# Altium PCB main_mini.PcbDoc
Units mm, origin at the board's own origin, x right, y up, seen from the top; angles counter-clockwise.
Board outline 83.9 x 90.8 mm, 4 copper layers (Top Layer, Int1 (GND), Int2 (PWR), Bottom Layer), stack 1.369 mm thick; 97 components, 91 nets, 442 pads, 94 vias.
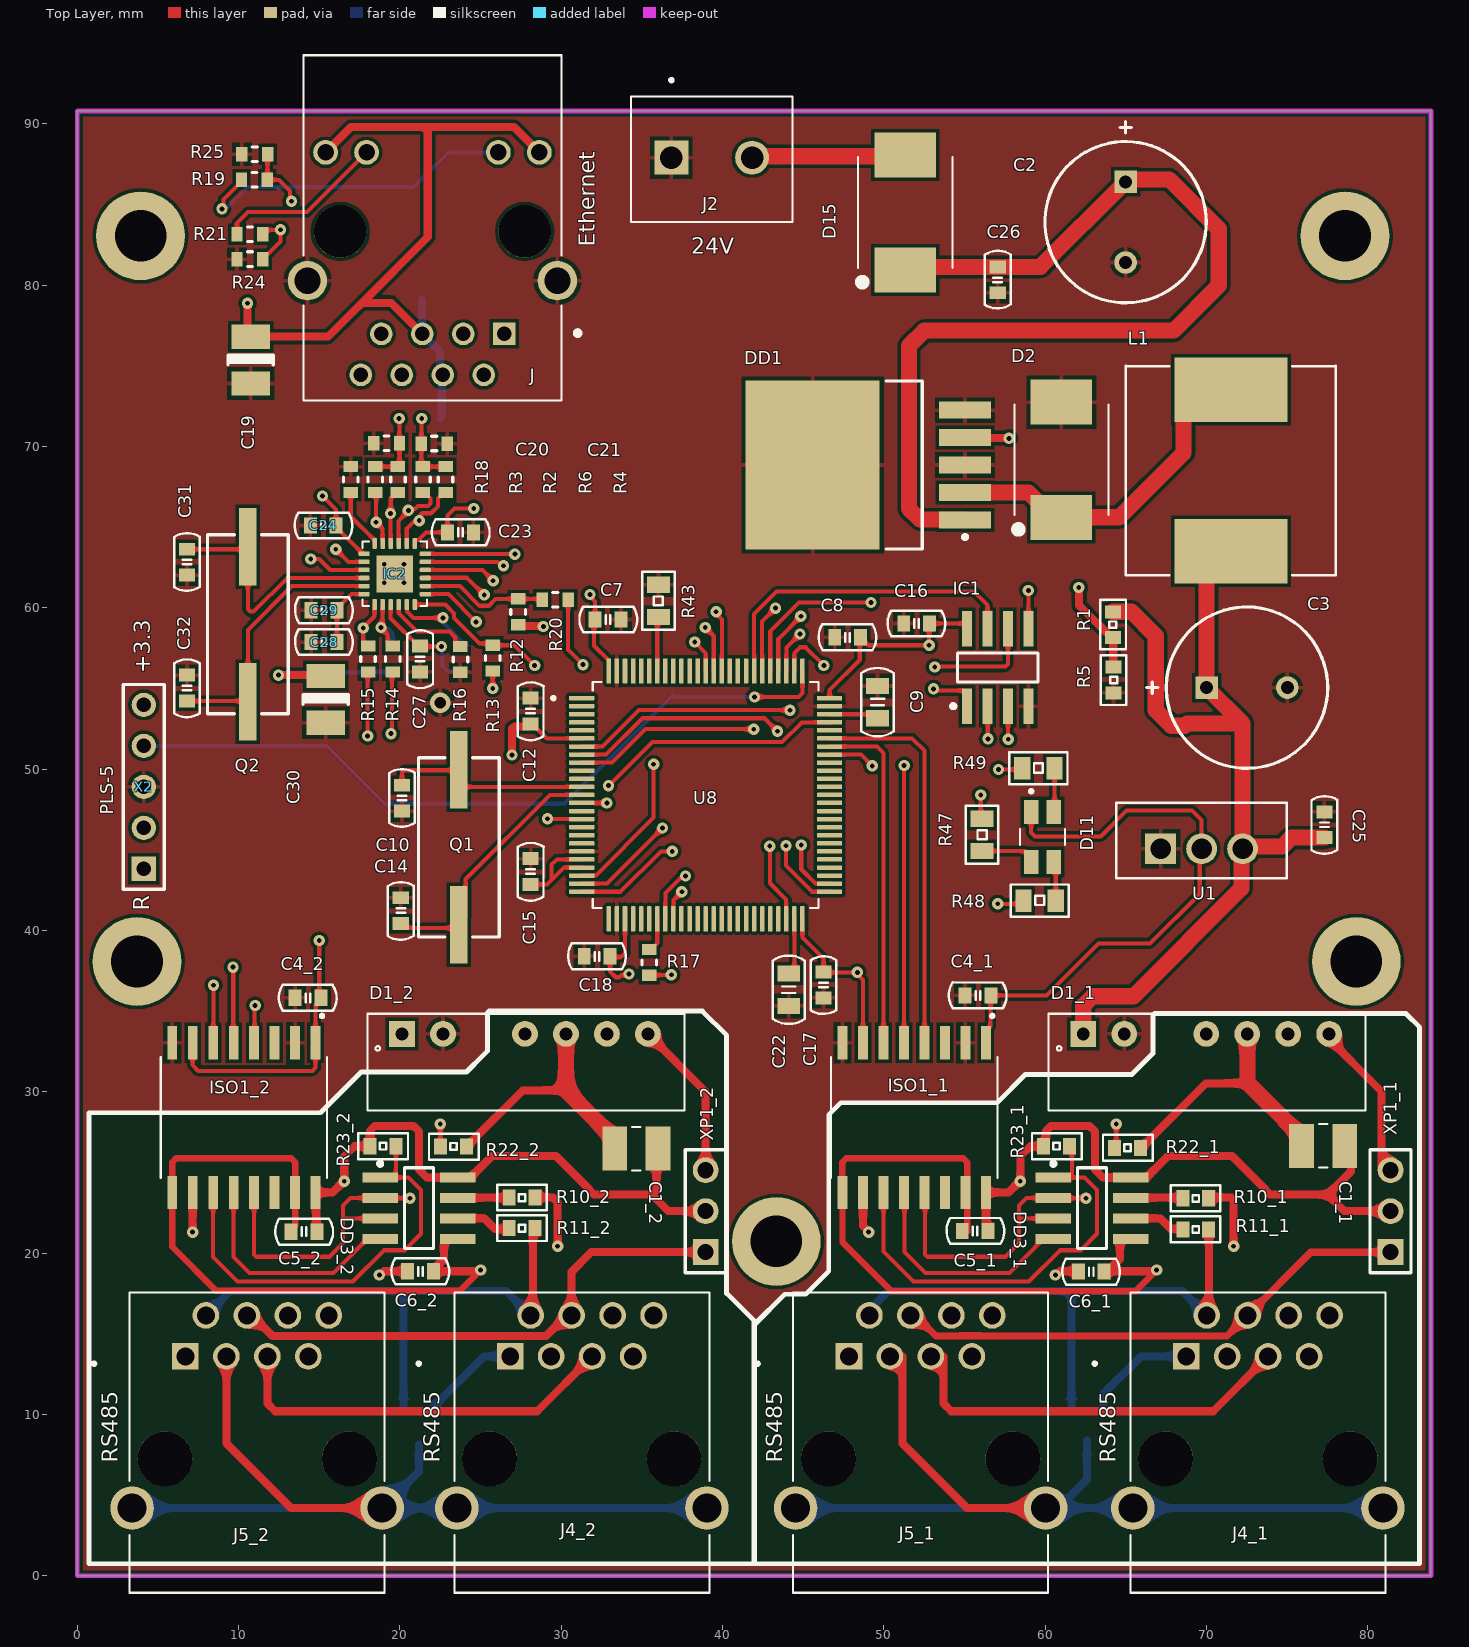
[diagram p0: Top Layer view]
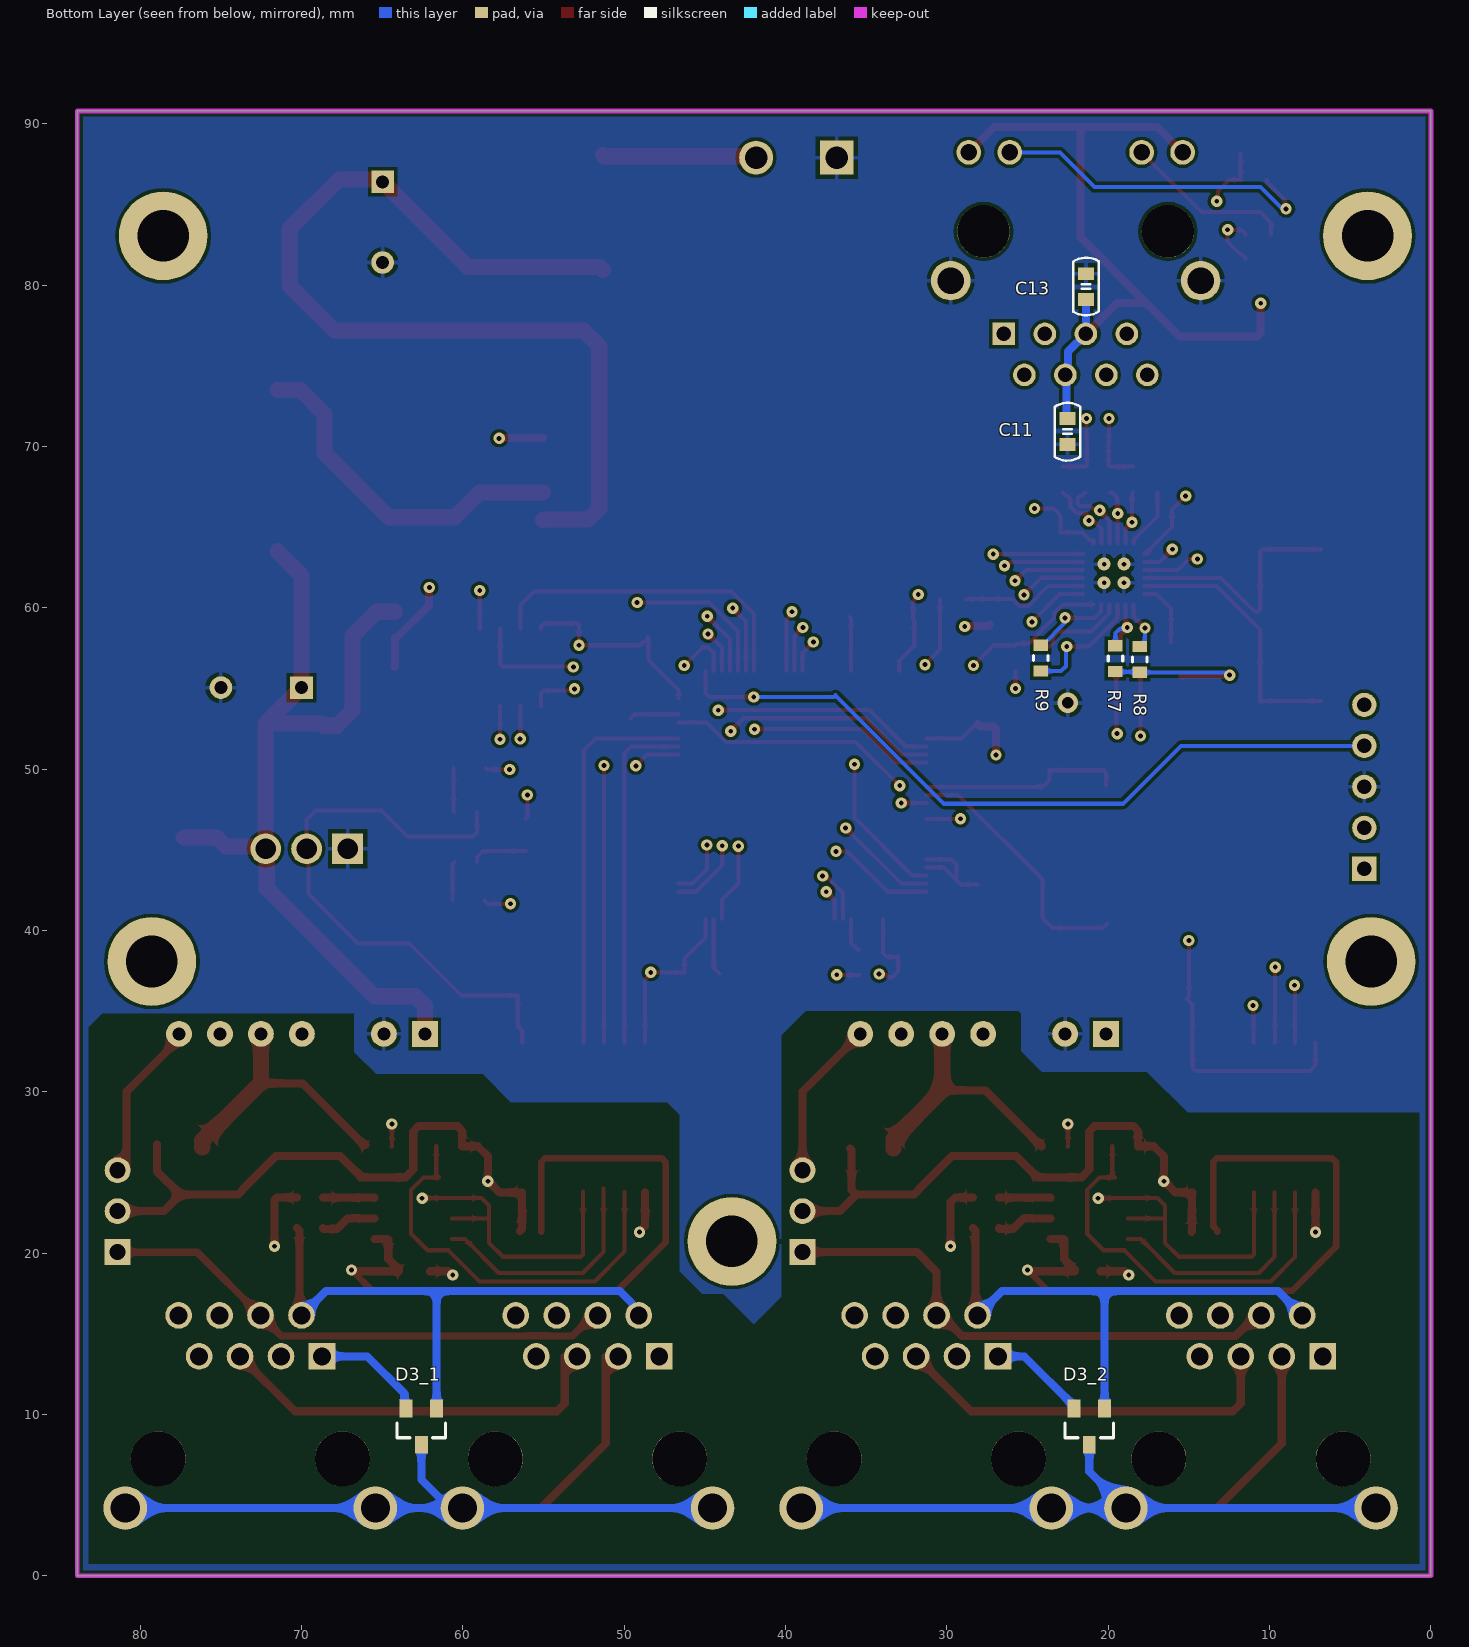
[diagram p1: Bottom Layer view, seen from below]
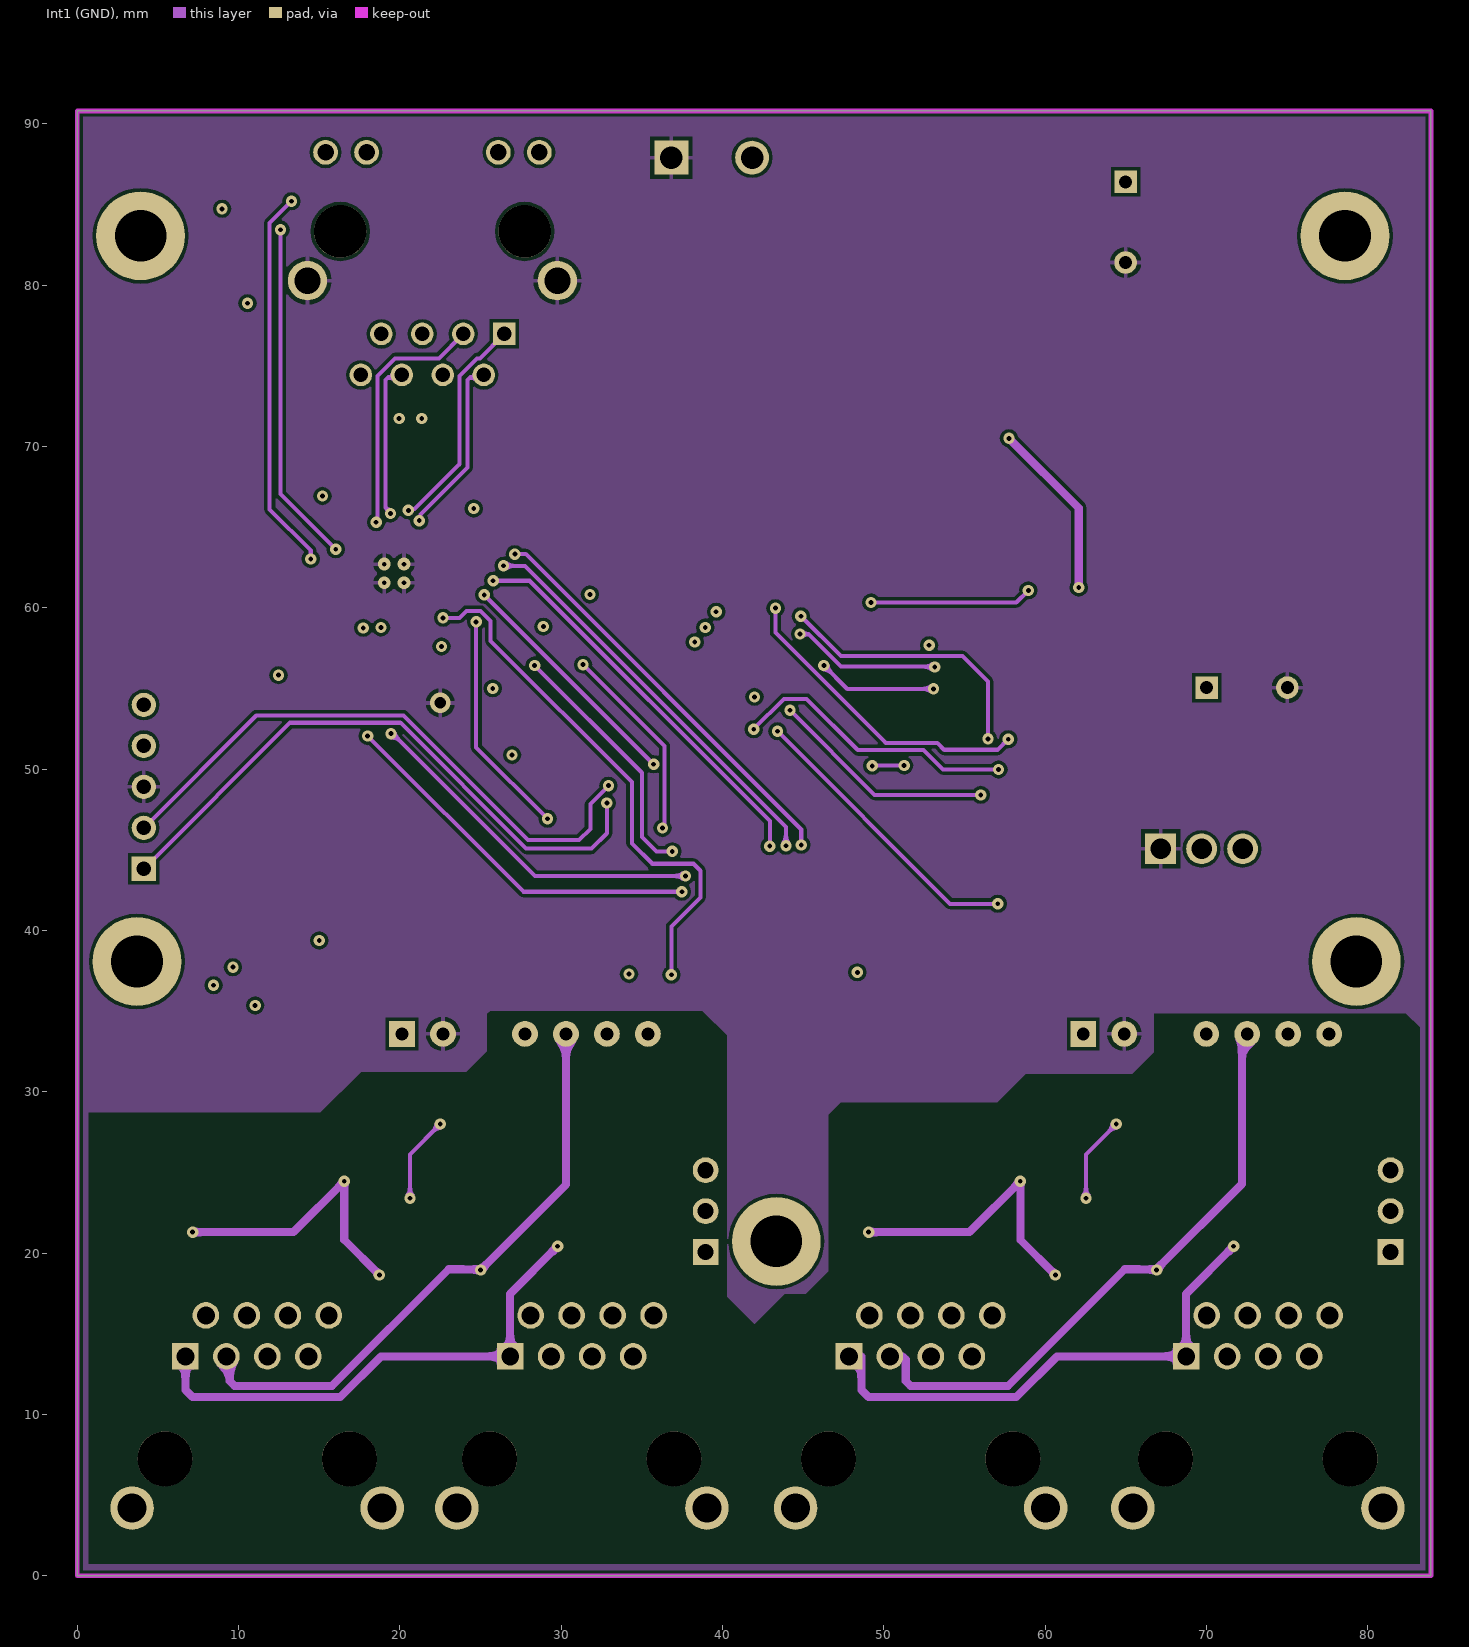
[diagram p2: Int1 (GND)]
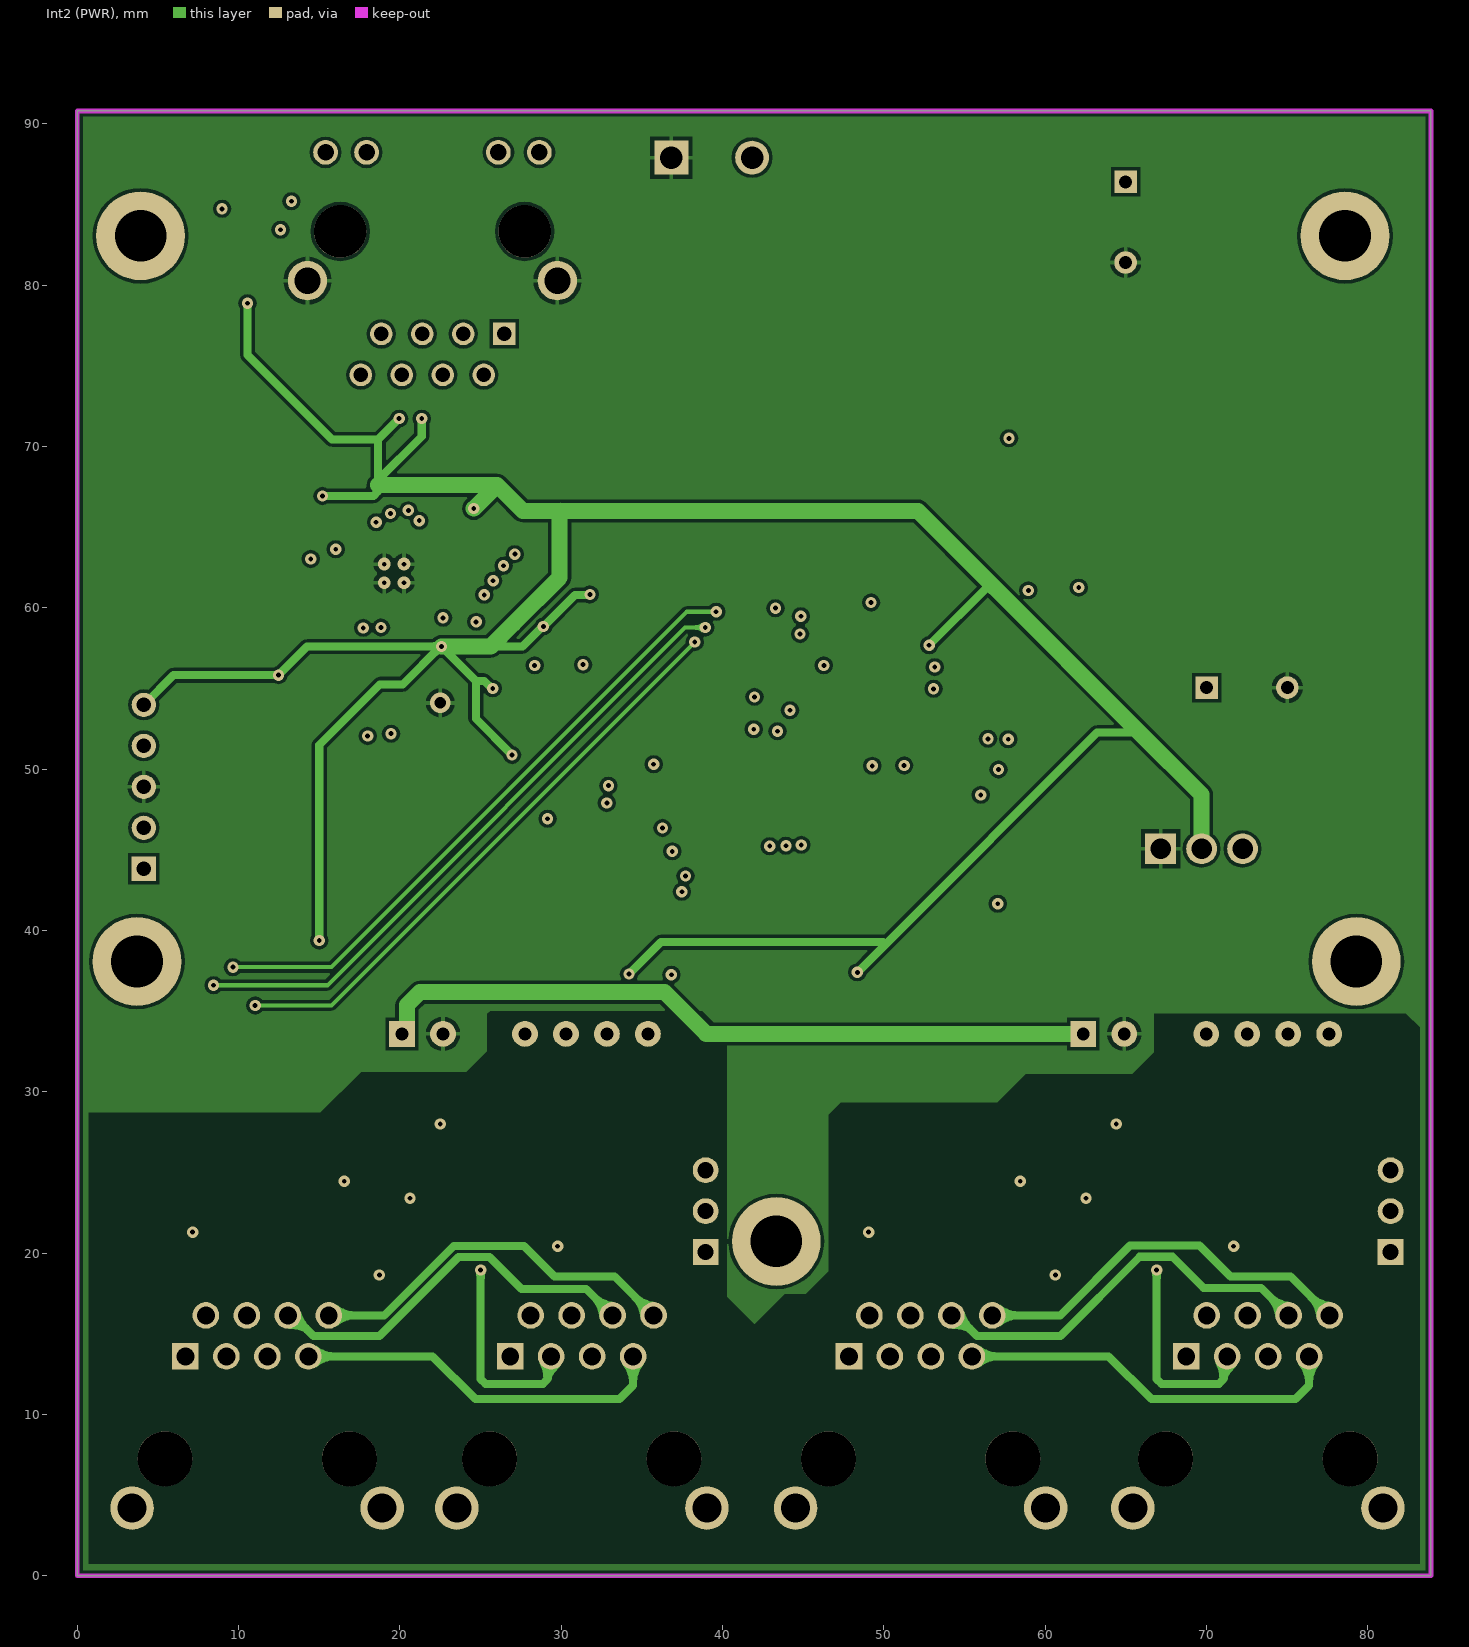
[diagram p3: Int2 (PWR)]

## Layer stack, top to bottom
Top Solder: solder mask 0.0254, SM-001, Dk 4
Top Layer: signal copper 0.035
Dielectric 1: prepreg 0.1295, PP-017, Dk 4.3
Dielectric 2: prepreg 0.1295, PP-017, Dk 4.3
Int1 (GND): signal copper 0.035
Dielectric 3: core 0.7112, Core-039, Dk 4.8
Int2 (PWR): signal copper 0.035
Dielectric 4: prepreg 0.1295, PP-017, Dk 4.3
Dielectric 5: prepreg 0.1295, PP-017, Dk 4.3
Bottom Layer: signal copper 0.035
Bottom Solder: solder mask 0.0254, SM-001, Dk 4

## Board outline
0,0 0,90.8 83.9,90.8 83.9,0

## Design rules (kind name [scope] priority, off if disabled: settings)
Clearance [All] p1: gap=0.2 ignorepadtopadclearanceinfootprint=FALSE
DiffPairsRouting [All] p1: maxlimit=0.254 minlimit=0.2 mostfreqgap=0.254 toplayer_minwidth=0.25 toplayer_maxwidth=0.381 toplayer_prefwidth=0.381 midlayer1_minwidth=0.25 midlayer1_maxwidth=0.381 midlayer1_prefwidth=0.381 midlayer2_minwidth=0.25 midlayer2_maxwidth=0.381 midlayer2_prefwidth=0.381 bottomlayer_minwidth=0.25 bottomlayer_maxwidth=0.381 bottomlayer_prefwidth=0.381 maxuncoupledlength=12.7
HoleSize [All] p1: absolutevalues=TRUE maxlimit=5 minlimit=0.025 maxpercent=80.000 minpercent=20.000
HoleToHoleClearance [All] p1: gap=0.2 allowstackedmicrovias=TRUE
MinimumSolderMaskSliver [All] p1: minsoldermaskwidth=0
PolygonConnect [All] p1: connectstyle=Relief reliefconductorwidth=0.254 reliefentries=4 polygonreliefangle="90 Angle" airgapwidth=0.254
RoutingVias [All] p1: holewidth=0.3 width=1 viastyle="Through Hole" minholewidth=0.3 minwidth=0 maxholewidth=1 maxwidth=4
SilkToSolderMaskClearance [IsPad] p1: minsilkscreentomaskgap=0.1 clearancetoexposedcopper=TRUE
SolderMaskExpansion [All] p1: expansion=0.102 istentingtop=FALSE
UnRoutedNet [All] p1: checkbadconnections=TRUE
Width [All] p1: maxlimit=4 minlimit=0.254 preferedwidth=0.254
24 further rules are at their usual default settings.

## Classes and differential pairs
channel class RS485: 1 2
component class main_mini: C2 C3 C7 C8 C9 C10 C11 C12 C13 C14 C15 C16 C17 C18 C19 C20 C21 C22 C23 C24 C25 C26 C27 C28 C29 C30 C31 C32 D2 D11 D15 DD1 IC1 IC2 J J2 L1 Q1 Q2 R1 R2 R3 R4 R5 R6 R7 R8 R9 R12 R13 R14 R15 R16 R17 R18 R19 R20 R21 R24 R25 R43 R47 R48 R49 U1 U8 X2
component class 2: C1_2 C4_2 C5_2 C6_2 D1_2 D3_2 DD3_2 ISO1_2 J4_2 J5_2 R10_2 R11_2 R22_2 R23_2 R26_2 R27_2 XP1_2
component class 1: C1_1 C4_1 C5_1 C6_1 D1_1 D3_1 DD3_1 ISO1_1 J4_1 J5_1 R10_1 R11_1 R22_1 R23_1 R26_1 R27_1 XP1_1
differential pair P1_TX: +P1_TX_P -P1_TX_N
differential pair P1_RX: +P1_RX_P -P1_RX_N

## Components (designator, comment, footprint, x,y, rotation, side; value= is the part's Value field where it differs from the comment)
C1_1 "10uF" CAPC3225X270N 77.225,26.65 r0 top (schematic designator C1)
C1_2 "10uF" CAPC3225X270N 34.65,26.475 r0 top (schematic designator C1)
C2 "220uF 50v" "ECR 10x13mm" 64.975,83.9 r270 top value=220uF
C3 "220uF 50v" "ECR 10x13mm" 72.5,55.05 r0 top value=220uF
C4_1 "0.1uF" "CAPACITOR 0603" 56.625,35.975 r180 top (schematic designator C4)
C4_2 "0.1uF" "CAPACITOR 0603" 15.1,35.825 r180 top (schematic designator C4)
C5_1 "0.1uF" "CAPACITOR 0603" 54.85,21.375 r0 top (schematic designator C5)
C5_2 "0.1uF" "CAPACITOR 0603" 13.25,21.325 r0 top (schematic designator C5)
C6_1 "0.1uF" "CAPACITOR 0603" 63.65,18.85 r180 top (schematic designator C6)
C6_2 "0.1uF" "CAPACITOR 0603" 22.075,18.875 r180 top (schematic designator C6)
C7 "0.1uF" "CAPACITOR 0603" 32.1,59.275 r0 top
C8 "0.1uF" "CAPACITOR 0603" 48.55,58.175 r180 top
C9 "2.2uF" "CAPACITOR 0805" 49.6,53.15 r90 top
C10 "20pF" "CAPACITOR 0603" 20.125,47.4 r90 top
C11 "0.1uF" "CAPACITOR 0603" 22.525,71.725 r270 bottom
C12 "0.1uF" "CAPACITOR 0603" 28.1,54.4 r270 top
C13 "0.1uF" "CAPACITOR 0603" 21.375,79.1 r90 bottom
C14 "20pF" "CAPACITOR 0603" 20.05,42.025 r270 top
C15 "0.001uF" "CAPACITOR 0603" 28.1,44.45 r270 top
C16 "0.1uF" "CAPACITOR 0603" 52.825,59.025 r180 top
C17 "0.1uF" "CAPACITOR 0603" 46.25,37.425 r270 top
C18 "0.1uF" "CAPACITOR 0603" 33.025,38.4 r180 top
C19 "Cap T" "TECAP B" 10.75,75.35 r270 top value="10 mkF"
C20 "100 nF" CAPCHIP0603 19.175,70.2 r180 top
C21 "100 nF" CAPCHIP0603 22.125,70.175 r0 top
C22 "2.2uF" "CAPACITOR 0805" 44.1,35.325 r90 top
C23 "0.1uF" "CAPACITOR 0603" 22.95,64.675 r0 top
C24 "0.1uF" "CAPACITOR 0603" 14.445,65.1 r0 top
C25 "0.1uF" "CAPACITOR 0603" 77.3,47.35 r270 top
C26 "0.1uF" "CAPACITOR 0603" 57.05,79.525 r90 top
C27 "0.1uF" "CAPACITOR 0603" 21.25,57.625 r270 top
C28 "0.1uF" "CAPACITOR 0603" 16.1,57.875 r180 top
C29 "1uF" "CAPACITOR 0603" 16.1,59.85 r180 top
C30 "TECAP B 10u 16V" "TECAP B" 15.4,54.325 r270 top
C31 "20pF" "CAPACITOR 0603" 6.8,62.025 r90 top
C32 "20pF" "CAPACITOR 0603" 6.8,55.825 r270 top
D1_1 "AM1DS-0505SJZ" AM2D-NZ 62.355,33.586 r0 top (schematic designator D1)
D1_2 "AM1DS-0505SJZ" AM2D-NZ 20.13,33.586 r0 top (schematic designator D1)
D2 "MBRS540T3G" DIOM7958X213N 61,69.175 r90 top
D3_1 "SM712" SOT23 62.575,9.25 r270 bottom (schematic designator D3)
D3_2 "SM712" SOT23 21.175,9.25 r270 bottom (schematic designator D3)
D11 "150141M173100" LED_150141M173100 59.825,45.8 r90 top
D15 "MBRS540T3G" DIOM7958X213N 51.325,84.5 r90 top
DD1 "LM2596S-ADJ" TO-263 49.025,68.85 r180 top
DD3_1 "MAX485" NSO8 62.9,22.785 r0 top (schematic designator DD3)
DD3_2 "MAX485" NSO8 21.175,22.785 r0 top (schematic designator DD3)
IC1 "GD25Q16CTIGR" NSO8 57.05,56.3 r90 top
IC2 "LAN8742A-CZ-TR" LAN8742A 18.425,60.845 r0 top
ISO1_1 "D?" *SOIC127P1030X265-16N 51.875,28.4 r270 top (schematic designator ISO1)
ISO1_2 "D?" *SOIC127P1030X265-16N 10.325,28.4 r270 top (schematic designator ISO1)
J "HR911105A" HANRUN_HR911105A 22.015,83.325 r0 top
J2 "TB003-500-P02BE" CUI_TB003-500-P02BE 36.825,87.9 r0 top
J4_1 "A-2004-2-4-LPS-N-R" ASSMANN_A-2004-2-4-LPS-N-R 73.175,7.25 r0 top (schematic designator J4)
J4_2 "A-2004-2-4-LPS-N-R" ASSMANN_A-2004-2-4-LPS-N-R 31.275,7.25 r0 top (schematic designator J4)
J5_1 "A-2004-2-4-LPS-N-R" ASSMANN_A-2004-2-4-LPS-N-R 52.275,7.25 r0 top (schematic designator J5)
J5_2 "A-2004-2-4-LPS-N-R" ASSMANN_A-2004-2-4-LPS-N-R 11.15,7.25 r0 top (schematic designator J5)
L1 "SRR1208-6R5ML" SRR1208 71.5,68.5 r270 top
Q1 "12MHz" HC49SM 23.65,45.15 r90 top
Q2 "25MHz" HC49SM 10.575,58.975 r270 top
R1 "3K" "Resistor 0603" 64.2,58.15 r90 top
R2 "50R" RESCHIP0603 19.875,67.95 r90 top
R3 "50R" RESCHIP0603 18.475,67.95 r90 top
R4 "50R" RESCHIP0603 22.825,67.95 r90 top
R5 "1K" "Resistor 0603" 64.225,56.325 r270 top
R6 "50R" RESCHIP0603 21.425,67.95 r90 top
R7 "10k" RESCHIP0603 19.55,56.85 r270 bottom
R8 "10k" RESCHIP0603 18.05,56.8 r270 bottom
R9 "10k" RESCHIP0603 24.175,56.875 r270 bottom
R10_1 "10" "Resistor 0603" 70.125,23.4 r180 top (schematic designator R10)
R10_2 "10" "Resistor 0603" 28.375,23.45 r180 top (schematic designator R10)
R11_1 "10" "Resistor 0603" 70.125,21.475 r180 top (schematic designator R11)
R11_2 "10" "Resistor 0603" 28.375,21.55 r180 top (schematic designator R11)
R12 "10k" RESCHIP0603 27.325,59.75 r270 top
R13 "10k" RESCHIP0603 25.75,56.875 r270 top
R14 "33R" RESCHIP0603 19.55,56.825 r90 top
R15 "33R" RESCHIP0603 18.025,56.825 r90 top
R16 "10k" RESCHIP0603 23.75,56.8 r90 top
R17 "33R" RESCHIP0603 35.45,38.025 r270 top
R18 "12.1k" RESCHIP0603 16.95,67.95 r90 top
R19 "220 Ом" RESCHIP0603 10.975,86.525 r180 top
R20 "33R" RESCHIP0603 29.625,60.5 r180 top
R21 "220 Ом" RESCHIP0603 10.7,83.15 r180 top
R22_1 "10K" "Resistor 0603" 64.3,26.525 r0 top (schematic designator R22)
R22_2 "10K" "Resistor 0603" 22.525,26.6 r0 top (schematic designator R22)
R23_1 "10K" "Resistor 0603" 59.9,26.625 r0 top (schematic designator R23)
R23_2 "10K" "Resistor 0603" 18.15,26.625 r0 top (schematic designator R23)
R24 "10k" RESCHIP0603 10.702,81.609 r0 top
R25 "10k" RESCHIP0603 11.002,88.11 r0 top
R43 "510" "Resistor 0805" 36.025,59.425 r90 top
R47 "3.9k" "Resistor 0805" 56.075,46.925 r270 top
R48 "3.9k" "Resistor 0805" 58.65,41.85 r0 top
R49 "3.9k" "Resistor 0805" 58.575,50.05 r0 top
U1 "LM1117T-3.3" TO254P470X1016X2222-3P 72.225,46.075 r0 top
U8 "STM32F303V" QFP50P1600X1600X160-100N 38.95,48.4 r0 top
X2 "PLS-5" PLS-5-3D 4.125,43.82 r90 top
XP1_1 "PLS-3" ZL201-3 81.4,22.6 r90 top (schematic designator XP1)
XP1_2 "PLS-3" ZL201-3 38.95,22.6 r90 top (schematic designator XP1)

## Footprints (in the part's own frame and the unit in brackets; to place one, negate y for a bottom-side part, rotate by r counter-clockwise, add the part's x,y. Pads: shape width x height; smd on the part's side, far side on the other; paste and mask are expansions set on the pad)
*SOIC127P1030X265-16N [mm]
  rect 2.06x0.6 smd: 1(-4.64,4.445) 2(-4.64,3.175) 3(-4.64,1.905) 4(-4.64,0.635) 5(-4.64,-0.635) 6(-4.64,-1.905) 7(-4.64,-3.175) 8(-4.64,-4.445) 9(4.64,-4.445) 10(4.64,-3.175) 11(4.64,-1.905) 12(4.64,-0.635) 13(4.64,0.635) 14(4.64,1.905) 15(4.64,3.175) 16(4.64,4.445)
  silkscreen extent -6.4,-5.15 3.75,5.15
AM2D-NZ [mm]
  rect 1.6x1.6 hole 0.8: 1(0,0)
  round 1.6 hole 0.8: 2(2.54,0) 4(7.62,0) 5(10.16,0) 6(12.7,0) 7(15.24,0)
  silkscreen extent -2.15,-4.75 17.5,1.25
ASSMANN_A-2004-2-4-LPS-N-R [mm]
  rect 1.65x1.65 hole 1.1: 1(-4.445,6.35)
  round 1.65 hole 1.1: 2(-3.175,8.89) 3(-1.905,6.35) 4(-0.635,8.89) 5(0.635,6.35) 6(1.905,8.89) 7(3.175,6.35) 8(4.445,8.89)
  round 2.7 hole 1.8: S1(-7.75,-3.05) S2(7.75,-3.05)
  round 3.4 hole 3.4 unplated: ""(-5.715,0) ""(5.715,0)
  silkscreen extent -10.21,-8.3 7.9,10.3
"CAPACITOR 0603" [mm]
  rect 0.8x1 smd: 1(0,0) 2(1.6,0)
  silkscreen extent -0.97,-0.8 2.6,0.8, body extent -0.01,-0.38 1.64,0.42, height 0.81
"CAPACITOR 0805" [mm]
  rect 1x1.4 smd: 1(0,0) 2(2,0)
  silkscreen extent -1.12,-1 3.12,1, body extent 0.01,-0.6 2.01,0.6, height 1.26
CAPC3225X270N [mm]
  rect 1.53x2.72 smd: 1(-1.341,0) 2(1.341,0)
  silkscreen extent -0.26,-1.35 0.26,1.35
CAPCHIP0603 [mm] "Chip Capacitor, 2-Leads, Body 1,6x0,8mm"
  rect 0.7x0.9 smd mask+0.06: 1(-0.8,0) 2(0.8,0)
  silkscreen extent -0.15,-0.45 0.15,0.45, body extent -0.8,-0.4 0.8,0.4, height 0.9
CUI_TB003-500-P02BE [mm]
  rect 2.1x2.1 hole 1.4: 1(0,0)
  round 2.1 hole 1.4: 2(5,0)
  silkscreen extent -2.5,-4 7.5,4.9
DIOM7958X213N [mil]
  rect 110x150 smd: A(140.49,0) C(-140.49,0)
  silkscreen extent -176,-115 135,115
"ECR 10x13mm" [mm] "Rad Capacitor 50В-220мкФ"
  rect 1.4x1.4 hole 0.8 mask+0.06: 1(-2.5,0)
  round 1.4 hole 0.8 mask+0.06: 2(2.5,0)
  silkscreen extent -6.22,-5 5,5, body extent -5,-5 4.97,5, height 12.51
HANRUN_HR911105A [mm]
  rect 1.398x1.398 hole 0.89: 1(4.45,-6.35)
  round 1.398 hole 0.89: 2(3.18,-8.89) 3(1.91,-6.35) 4(0.64,-8.89) 5(-0.63,-6.35) 6(-1.9,-8.89) 7(-3.17,-6.35) 8(-4.44,-8.89)
  round 1.53 hole 1.02: 9(6.625,4.9) 10(4.085,4.9) 11(-4.085,4.9) 12(-6.625,4.9)
  round 2.445 hole 1.63: 15(7.745,-3.05) 16(-7.745,-3.05)
  round 3.25 hole 3.25 unplated: ""(-5.715,0) ""(5.715,0)
  silkscreen extent -8,-10.48 9.15,10.92
HC49SM [mm] "Quartz crystal resonator"
  rect 4.8x1.1 smd mask+0.06: 1(-4.8,0) 2(4.8,0)
  silkscreen extent -5.55,-2.5 5.55,2.5, body extent -6.7,-2.45 6.7,2.45, height 5.09
LAN8742A [mm]
  rrect50% 0.69x0.28 smd: 1(-0.645,2.5) 2(-0.645,2) 3(-0.645,1.5) 4(-0.645,1) 5(-0.645,0.5) 6(-0.645,0) 13(3.145,0) 14(3.145,0.5) 15(3.145,1) 16(3.145,1.5) 17(3.145,2) 18(3.145,2.5)
  rrect50% 0.28x0.69 smd: 7(0,-0.645) 8(0.5,-0.645) 9(1,-0.645) 10(1.5,-0.645) 11(2,-0.645) 12(2.5,-0.645) 19(2.5,3.145) 20(2,3.145) 21(1.5,3.145) 22(1,3.145) 23(0.5,3.145) 24(0,3.145)
  rect 2.286x2.286 smd: 25(1.25,1.25)
  silkscreen extent -0.75,-0.74 3.26,3.27, body extent -0.75,-0.74 3.26,3.27, height 1
LED_150141M173100 [mm]
  rect 1.5x0.9 smd: 1(1.55,0.7) 2(1.55,-0.7) 3(-1.55,0.7) 4(-1.55,-0.7)
  silkscreen extent -0.5,-1.4 2.92,1.4
NSO8 [mm] "SOIC, 8-Leads, Body 4.9x3.9mm, Pitch 1.27mm"
  rect 2.2x0.6 smd mask+0.06: 1(-2.4,1.905) 2(-2.4,0.635) 3(-2.4,-0.635) 4(-2.4,-1.905) 5(2.4,-1.905) 6(2.4,-0.635) 7(2.4,0.635) 8(2.4,1.905)
  silkscreen extent -2.52,-2.5 0.9,2.88, body extent -3,-2.45 3,2.45, height 1.7
PLS-5-3D [mm] "Connector; Header; 5 Position"
  rect 1.5x1.5 hole 0.9: 1(0,0)
  round 1.5 hole 0.9: 2(2.54,0) 3(5.08,0) 4(7.62,0) 5(10.16,0)
  silkscreen extent -1.27,-1.27 11.43,1.27, body extent -1.27,-1.27 11.43,1.27, height 8.44
QFP50P1600X1600X160-100N [mm]
  rrect25% 1.56x0.28 smd: 1(-7.68,6) 2(-7.68,5.5) 3(-7.68,5) 4(-7.68,4.5) 5(-7.68,4) 6(-7.68,3.5) 7(-7.68,3) 8(-7.68,2.5) 9(-7.68,2) 10(-7.68,1.5) 11(-7.68,1) 12(-7.68,0.5) 13(-7.68,0) 14(-7.68,-0.5) 15(-7.68,-1) 16(-7.68,-1.5) 17(-7.68,-2) 18(-7.68,-2.5) 19(-7.68,-3) 20(-7.68,-3.5) 21(-7.68,-4) 22(-7.68,-4.5) 23(-7.68,-5) 24(-7.68,-5.5) 25(-7.68,-6) 51(7.68,-6) 52(7.68,-5.5) 53(7.68,-5) 54(7.68,-4.5) 55(7.68,-4) 56(7.68,-3.5) 57(7.68,-3) 58(7.68,-2.5) 59(7.68,-2) 60(7.68,-1.5) 61(7.68,-1) 62(7.68,-0.5) 63(7.68,0) 64(7.68,0.5) 65(7.68,1) 66(7.68,1.5) 67(7.68,2) 68(7.68,2.5) 69(7.68,3) 70(7.68,3.5) 71(7.68,4) 72(7.68,4.5) 73(7.68,5) 74(7.68,5.5) 75(7.68,6)
  rrect25% 0.28x1.56 smd: 26(-6,-7.68) 27(-5.5,-7.68) 28(-5,-7.68) 29(-4.5,-7.68) 30(-4,-7.68) 31(-3.5,-7.68) 32(-3,-7.68) 33(-2.5,-7.68) 34(-2,-7.68) 35(-1.5,-7.68) 36(-1,-7.68) 37(-0.5,-7.68) 38(0,-7.68) 39(0.5,-7.68) 40(1,-7.68) 41(1.5,-7.68) 42(2,-7.68) 43(2.5,-7.68) 44(3,-7.68) 45(3.5,-7.68) 46(4,-7.68) 47(4.5,-7.68) 48(5,-7.68) 49(5.5,-7.68) 50(6,-7.68) 76(6,7.68) 77(5.5,7.68) 78(5,7.68) 79(4.5,7.68) 80(4,7.68) 81(3.5,7.68) 82(3,7.68) 83(2.5,7.68) 84(2,7.68) 85(1.5,7.68) 86(1,7.68) 87(0.5,7.68) 88(0,7.68) 89(-0.5,7.68) 90(-1,7.68) 91(-1.5,7.68) 92(-2,7.68) 93(-2.5,7.68) 94(-3,7.68) 95(-3.5,7.68) 96(-4,7.68) 97(-4.5,7.68) 98(-5,7.68) 99(-5.5,7.68) 100(-6,7.68)
  silkscreen extent -9.54,-7 7,7
RESCHIP0603 [mm] "Chip Resistor, 2-Leads, Body 1,6x0,8mm"
  rect 0.7x0.9 smd mask+0.06: 1(-0.8,0) 2(0.8,0)
  silkscreen extent -0.15,-0.45 0.15,0.45, body extent -0.8,-0.4 0.8,0.4, height 0.4
"Resistor 0603" [mm]
  rect 0.8x1 smd: 1(0,0) 2(1.6,0)
  silkscreen extent -0.72,-0.8 2.35,0.8, body extent -0.03,-0.45 1.63,0.45, height 0.46
"Resistor 0805" [mm]
  rect 1x1.4 smd: 1(0,0) 2(2,0)
  silkscreen extent -0.8,-1 2.8,1, body extent -0.03,-0.65 2.02,0.65, height 0.41
SOT23 [mm] "SOT23, 3-Leads, Body 2.9x1.3mm, Pitch 0.95mm"
  rect 1.1x0.8 smd mask+0.06: 1(-1.125,0.95) 2(-1.125,-0.95) 3(1.125,0)
  silkscreen extent -0.2,-1.5 0.7,1.5, body extent -1.32,-1.5 1.32,1.5, height 1.08
SRR1208 [mm]
  rect 4x7 smd: P$1(-5,0) P$2(5,0)
  silkscreen extent -6.5,-6.5 6.5,6.5
"TECAP B" [mm] "Chip Capacitor, 2-Leads, Body 3,5x2,8mm"
  rect 1.5x2.4 smd mask+0.06: 1(-1.45,0) 2(1.45,0)
  silkscreen extent -0.3,-1.4 0.3,1.4, body extent -1.75,-1.4 1.75,1.4, height 1.92
TO254P470X1016X2222-3P [mil]
  rect 75x75 hole 50: 1(-200,-40)
  round 75 hole 50: 2(-100,-40) 3(0,-40)
  silkscreen extent -308,-112 108,72
TO-263 [mm] "D2-PAK, 6-Leads, Body 8.6x10.2mm, Pitch 1.7mm, Lead Span 14.1mm"
  rect 3.2x1.05 smd mask+0.06: 1(-6,3.4) 2(-6,1.7) 3(-6,0) 4(-6,-1.7) 5(-6,-3.4)
  rect 8.3x10.45 smd mask+0.06: 6(3.45,0)
  silkscreen extent -6.13,-5.2 -1.1,5.2, body extent -7.18,-5.08 7.46,5.08, height 4.57
ZL201-3 [mm] "Connector; PLS-3; pitch 2.54"
  rect 1.6x1.6 hole 1 mask+0.06: 1(-2.54,0)
  round 1.6 hole 1 mask+0.06: 2(0,0) 3(2.54,0)
  silkscreen extent -3.81,-1.27 3.81,1.27, body extent -3.81,-1.27 3.81,1.27, height 8.44

## Part data
C1_1 C1_2 C4_1 C4_2 C5_1 C5_2 C6_1 C6_2 C7 C8 C9 C10 C11 C12 C13 C14 C15 C16 C17 C18 C22 C23 C24 C25 C26 C27 C28 C29 C31 C32: library part Capasitor
C2 C3: library part "Cap Pol", "Polarized Capacitor (Rad)", Voltage=50, Type=Type, URL=http://www.hitano.com.tw/PDF/ECR_081225.pdf
C19: "Solid Tantalum Surface Mount Capacitors", Voltage=6v, Type=Type
C20 C21: library part "Cap C", "Керамическтй конденсатор SMD C0603", Type=0603
C30: library part "Cap T", "Solid Tantalum Surface Mount Capacitors", Voltage=16V, Type="TECAP B"
D2 D15: "Diode Schottky 40V 5A Surface Mount SMC", Package="DO-214 ON Semiconductor", Availability=Unavailable, MF="ON Semiconductor", MP=MBRS540T3G, Price=None, SnapEDA_Link=https://www.snapeda.com/parts/MBRS540T3G/ON%20Semiconductor/view-part/78777/?ref=snap
D3_1 D3_2: "Asymmetrical TVS Diode for Extended Common-Mode RS-485"
D11: "Red, Green, Blue _RGB_ 625nm Red, 520nm Green, 470nm Blue LED Indication - Discrete 2V Red, 3.2V Green, 3.2V Blue 1411 _3528 Metric_", Package="1411 WÃ¼rth Elektronik", Availability=Unavailable, MF="Wurth Electronics", MP=150141M173100, Price=None, SnapEDA_Link=https://www.snapeda.com/parts/150141M173100/Wurth%20Electronics%20Inc./view-part/281733/?ref=snap
DD1: "SIMPLE SWITCHER® Power Converter 150 KHz 3A Step-Down Voltage Regulator, 5-pin TO-263", Manufacturer="National Semiconductor", ComponentLink1URL=http://www.national.com/ds/LM/LM2596.pdf, ComponentLink2URL=http://www.national.com/pf/LM/LM2596.html, ComponentLink3URL=http://www.national.com/packaging/folders/ts5b.html, CompType=Switcher, PartNumber=LM2596S-ADJ, Published=13.04.2012, Publisher="Reukov A.V."
DD3_1 DD3_2: "Low-Power, Slew-Rate-Limited RS-485/RS-422 Transceiver", ComponentLink1URL=http://pdfserv.maxim-ic.com/en/ds/MAX1487-MAX491.pdf, Type=MAX485
IC1: library part W25Q128FVEIG, "128M-bit Serial Flash Memory with uniform 4KB sectors and Dual/Quad SPI and QPI"
ISO1_1 ISO1_2: library part ISO7341
J: "HR911105A Ethernet Interface Arduino Platform Evaluation Expansion Board", Package=None, Availability=Unavailable, MF=DFRobot, MP=HR911105A, Price=None, SnapEDA_Link=https://www.snapeda.com/parts/HR911105A/DFRobot/view-part/214807/?ref=snap
J2: "2~24 Poles, Screw Type, Horizontal, 5.0 Pitch, 26~14 _AWG_, Terminal Block Connector", Package=None, Availability=Unavailable, MF="CUI Devices", MP=TB003-500-P02BE, Price=None, SnapEDA_Link=https://www.snapeda.com/parts/TB003-500-P02BE/CUI%20Devices/view-part/3590637/?ref=snap
J4_1 J4_2 J5_1 J5_2: "Jack Modular Connector 8p8c _RJ45, Ethernet_ 90Â° Angle _Right_ Shielded", Package=None, Availability=Unavailable, MF="Assmann WSW", MP=A-2004-2-4-LPS-N-R, Price=None, SnapEDA_Link=https://www.snapeda.com/parts/A-2004-2-4-LPS-N-R/Assmann%20WSW%20Components/view-part/454861/?ref=snap
L1: "6.5ÂµH Shielded Wirewound Inductor 6A 18mOhm Max Nonstandard", Package="Nonstandard Bourns", Availability=Unavailable, MF=Bourns, MP=SRR1208-6R5ML, Price=None, SnapEDA_Link=https://www.snapeda.com/parts/SRR1208-6R5ML/Bourns/view-part/353452/?ref=snap
Q1 Q2: library part "Quartz Crystal", "Quartz Crystal"
R1 R5 R10_1 R10_2 R11_1 R11_2 R22_1 R22_2 R23_1 R23_2 R43 R47 R48 R49: library part Resistor
R2 R3 R4 R6 R7 R8 R9 R12 R13 R14 R15 R16 R17 R18 R20 R24 R25: library part Res, "Резистор", Power_W={Power_W}, Tolerance_Percent={Tolerance_Percent}, Body={Body}, Class="Электронные компоненты", Installation={Installation}, Ordering_Information={Ordering_Information}, Pins=2, SubClass=Резисторы
R19 R21: library part Res, "Резистор SMD R0603", Tolerance=%, PWR=Value, Type=0603
U1: "Linear Voltage Regulator IC 1 Output 800mA TO-220-3", Package="TO-220 Texas Instruments", Availability=Unavailable, MF="Texas Instruments", MP=LM1117T-3.3, Price=None, SnapEDA_Link=https://www.snapeda.com/parts/LM1117T-3.3/Texas%20Instruments/view-part/103788/?ref=snap
U8: "ARMÂ® CortexÂ®-M4 STM32F3 Microcontroller IC 32-Bit 72MHz 100-LQFP (14x14)", Package="LQFP-100 STMicroelectronics", Availability=Unavailable, MF=STMicroelectronics, MP=STM32F303V, Price=None
X2: "Header, 5-Pin", LatestRevisionDate=17-Jul-2002, LatestRevisionNote="Re-released for DXP Platform.", Publisher="Altium Limited"
XP1_1 XP1_2: library part "Select jump", "Connector, 3-Pin", Class="Электронные компоненты", Installation=DIP, Ordering_Information={Ordering_Information}, Pins=3, Pitch_mm={Pitch_mm}, SubClass=Разъемы, Type_of_connector={Type_of_connector}

## Free pads (board coordinates)
  round 5.5 hole 3.2: 3(3.925,83.05) 4(78.575,83.05) 5(79.275,38.075) 6(3.7,38.075) 7(43.325,20.725)

## Via types
v1: diameter 0.7, hole 0.3, Top Layer to Bottom Layer, tented both sides, 89 vias
v2: diameter 0.8, hole 0.3, Top Layer to Bottom Layer, tented both sides, 4 vias
v3: diameter 1.27, hole 0.711, Top Layer to Bottom Layer, tented both sides, 1 vias

## Nets (pads, with @x,y where several pads share a name; then routed paths per layer and width w, separated by ;. In a path a pad name is that pad's centre, name@x,y a point inside that pad or via, vN(x,y) a via of type N, cw(c..) or ccw(c..) an arc to the next point about the centre after c; other vN are vias at no path point)
3.3v: C15.2 U8.21 U8.22 | length 6.6
  Top Layer w0.254: C15.2 29.125,42.85 29.4,43.125 ; U8.22 30.175,43.9 29.4,43.125 ; U8.21 29.725,44.4 29.4,44.075 29.4,43.125
485_A_1: D3_1.1 J4_1.2 J5_1.2 R11_1.1 | length 35.1
  Top Layer w0.5: J4_1.2 70.138,16.277 70.138,21.413 R11_1.1@70.275,21.55
  Bottom Layer w0.5: J5_1.2@49.042,16.394 49.546,16.897 49.546,16.921 50.275,17.65 61.625,17.65 ; D3_1.1@61.625,10.236 61.625,17.65 ; J4_1.2 68.49,17.65 61.625,17.65
485_A_2: D3_2.1 J4_2.2 J5_2.2 R11_2.1 | length 34.2
  Top Layer w0.5: J4_2.2 28.238,16.277 28.238,21.413 R11_2.1
  Bottom Layer w0.5: J5_2.2 9.485,17.65 20.225,17.65 ; D3_2.1 20.225,17.65 ; J4_2.2 26.59,17.65 20.225,17.65
485_B_1: D3_1.2 J4_1.1 J5_1.1 R10_1.1 | length 42.8
  Top Layer w0.5: R10_1.1@70.275,23.45 71.529,23.45 71.675,23.304 v1(71.675,20.425)
  Int1 (GND) w0.5: J5_1.1@48.605,13.6 48.605,11.52 49.05,11.075 58.2,11.075 60.725,13.6 J4_1.1 68.73,15.419 68.725,15.424 68.725,17.475 v1(71.675,20.425)
  Bottom Layer w0.5: D3_1.2 63.618,10.468 63.618,11.293 65.925,13.6 J4_1.1
485_B_2: D3_2.2 J4_2.1 J5_2.1 R10_2.1 | length 41.9
  Top Layer w0.5: R10_2.1 29.482,23.45 29.775,23.157 v1(29.775,20.425)
  Int1 (GND) w0.5: J5_2.1 6.705,11.52 7.15,11.075 16.3,11.075 18.825,13.6 J4_2.1 26.83,15.607 26.825,15.612 26.825,17.475 v1(29.775,20.425)
  Bottom Layer w0.5: D3_2.2 22.125,10.525 25.2,13.6 J4_2.1
+3.3v: C4_1.1 C4_2.1 C7.1 C8.1 C11.1 C12.2 C13.1 C16.1 C17.1 C18.1 C19.1 C20.1 C21.1 C23.1 C24.2 C27.1 C30.1 D11.1 IC1.8 IC2.1 IC2.9 IC2.19 ISO1_1.1 ISO1_1.7 ISO1_2.1 ISO1_2.7 J.4 J.5 J.9 J.12 R2.2 R3.2 R4.2 R6.2 R7.2 R8.2 R9.2 R12.2 R13.2 U1.2 U8.6 U8.28 U8.50 U8.75 U8.100 X2.5 | length 393.8
  Top Layer w0.254: ISO1_2.7 7.15,31.65 7.5,31.3 14.576,31.3 14.77,31.494 ISO1_2.1 14.77,35.395 15.1,35.725 C4_2.1 15,35.925 v1(15,39.375) ; v1(15.2,66.925) 16.045,66.08 C24.2 16.045,65 17.562,63.483 17.562,63.358 17.575,63.345 IC2.1 ; R3.2 R2.2 19.975,68.85 C20.1 19.963,70.212 19.963,71.712 v1(19.95,71.725) ; IC2.9 19.425,59.35 21.15,57.625 C27.1 21.275,57.6 v1(22.575,57.6) ; IC2.19 20.925,64.195 20.938,64.208 21.143,64.208 21.61,64.675 C23.1 22.95,65.725 23.375,66.15 v1(24.575,66.15) ; v1(21.35,71.725) 21.338,71.713 21.338,70.188 C21.1 21.325,68.85 R6.2 R4.2 ; v1(25.75,55) R13.2 ; R12.2 28.379,58.95 28.458,58.871 ; C12.2 28.2,52.8 29.1,51.9 U8.6 ; v1(31.775,60.825) 31.775,60.704 32.1,60.379 C7.1 32.025,59.2 32.025,57.645 32.95,56.72 U8.100 ; U8.28 33.95,38.6 33.7,38.35 33.075,38.35 C18.1 33.025,37.45 33.375,37.1 33.585,37.1 33.7,37.215 34.115,37.215 v1(34.2,37.3) ; U8.50 44.95,39.55 46.25,38.25 C17.1 46.275,37.4 48.229,37.4 48.7,36.929 ISO1_1.7 ; U8.75 46.63,54.905 48.5,56.775 48.5,58.125 C8.1 48.55,58.075 48.823,57.802 48.923,57.802 49.05,57.675 v1(52.8,57.675) 52.8,59 C16.1 54.972,59.025 55.145,58.852 IC1.8 ; ISO1_1.1 56.32,33.77 56.6,34.05 56.6,35.95 C4_1.1 60.087,35.975 63.312,39.2 66.5,39.2 69.575,42.275 69.575,44.949 U1.2 69.685,46.84 69.1,47.425 65.032,47.425 63.438,45.83 59.37,45.83 59.125,46.075 D11.1
  Top Layer w0.5: v1(10.55,78.875) 10.55,77 C19.1 15.55,76.8 17.125,78.375 17.65,78.9 ; v1(12.475,55.825) 15.35,55.825 C30.1 ; J.12 16.965,89.8 21.432,89.8 ; J.5 19.46,78.9 17.65,78.9 ; v1(26.95,50.875) 26.95,52.507 27.093,52.65 27.95,52.65 C12.2 ; R12.2 27.404,58.871 28.458,58.871 28.854,58.871 v1(28.89,58.835) ; J.9 27.065,89.8 21.432,89.8 ; 17.65,78.9 21.725,82.975 21.725,89.507 21.432,89.8
  Int2 (PWR) w0.5: X2.5 5.97,55.825 v1(12.475,55.825) 14.25,57.6 v1@22.525,57.6 ; v1(10.55,78.875) 10.55,75.675 15.8,70.425 18.65,70.425 ; v1(15,39.375) 15,51.5 18.75,55.25 20.175,55.25 v1@22.525,57.6 ; v1(15.2,66.925) 18.357,66.925 18.65,67.218 18.65,67.6 18.65,67.925 ; v1(19.95,71.725) 18.65,70.425 ; v1(21.35,71.725) 21.35,70.625 18.65,67.925 ; 25.625,57.6 27.6,57.6 28.835,58.835 v1(28.89,58.835) 30.841,60.787 31.737,60.787 v1(31.775,60.825) ; v1(25.75,55) 25.696,55 25.226,55.47 24.705,55.47 ; v1(26.95,50.875) 24.705,53.12 24.705,55.47 ; v1(34.2,37.3) 36.175,39.275 49.95,39.275 50.087,39.137 ; v1(48.35,37.4) 50.087,39.137 ; v1(52.8,57.675) 56.387,61.262 56.838,61.262 ; 65.837,52.263 63.213,52.263 50.087,39.137 ; 18.65,67.925 18.65,70.425 ; v1@22.525,57.6 v1(22.575,57.6) 24.705,55.47
  Int2 (PWR) w1: 18.65,67.6 26.025,67.6 ; v1(22.575,57.6) 25.625,57.6 27.025,59 29.9,61.875 29.9,65.95 29.95,66 ; v1(24.575,66.15) 26.025,67.6 ; U1.2 69.685,48.415 65.837,52.263 56.838,61.262 52.1,66 29.95,66 ; 26.025,67.6 27.625,66 29.95,66
  Bottom Layer w0.254: v1@12.771,56 R8.2 18.075,56.025 19.525,56.025 R7.2 ; v1(22.575,57.6) 22.625,57.55 22.625,56.375 22.925,56.075 R9.2
  Bottom Layer w0.5: C13.1 21.38,79.095 21.38,76.98 J.5 22.483,75.877 22.483,74.607 J.4 22.59,74.37 22.59,71.79 C11.1
+5v: C3.1 C25.2 D1_1.1 D1_2.1 L1.P$2 R1.2 U1.3 | length 101.3
  Top Layer w1: D1_1.1 62.355,35.339 62.941,35.925 65.475,35.925 72.156,42.606 72.156,44.99 U1.3 ; R1.2 65.35,59.75 66.85,58.25 66.85,53.65 67.811,52.689 68.639,52.689 68.775,52.825 72.225,52.825 ; L1.P$2 70,62 C3.1 72.225,52.825 ; C25.2 75.23,45.75 74.678,45.197 72.363,45.197 U1.3 ; U1.3 72.225,52.825
  Int2 (PWR) w1: D1_2.1 20.43,33.886 20.43,35.369 21.236,36.175 36.4,36.175 38.989,33.586 D1_1.1
Eth_NRST: IC2.15 U8.23 | length 28.2
  Top Layer w0.254: IC2.15 21.583,61.858 24.167,61.858 v1(25.225,60.8) ; U8.23 31.283,43.413 32.145,43.413 35.725,46.993 v1(35.725,50.3)
  Int1 (GND) w0.254: v1(25.225,60.8) v1(35.725,50.3)
GND: C2.2 C3.2 C4_1.2 C4_2.2 C7.2 C8.2 C9.2 C10.1 C11.2 C12.1 C13.2 C14.1 C15.1 C16.2 C17.2 C18.2 C19.2 C20.2 C21.2 C22.1 C23.2 C24.1 C25.1 C26.1 C27.2 C28.2 C29.2 C30.2 C31.1 C32.1 D1_1.2 D1_2.2 D2.A DD1.3 DD1.5 DD1.6 IC1.4 IC2.25 ISO1_1.2 ISO1_1.8 ISO1_2.2 ISO1_2.8 J2.1 J.15 J.16 R5.2 R16.1 R18.2 R24.1 R25.1 R43.2 U1.1 U8.20 U8.27 U8.74 U8.99 X2.3
  other v2: 19.025,61.55 20.25,61.55 19.025,62.7 20.25,62.7
  other v3: 22.5,54.1
NetC1_1_1: C1_1.1 C5_1.1 C6_1.1 D1_1.5 D3_1.3 DD3_1.5 ISO1_1.9 ISO1_1.15 J4_1.3 J4_1.S1 J4_1.S2 J5_1.3 J5_1.S1 J5_1.S2 R22_1.2 | length 168.4
  Top Layer w0.4: C5_1.1@55.15,21.325 55.15,25.641 54.916,25.875 47.659,25.875 47.425,25.641 47.425,23.765 ISO1_1.9 47.43,20.67 50.45,17.65 65.6,17.65 v1@66.825,18.875
  Top Layer w0.5: J5_1.3@51.145,13.6 51.145,8.205 55.15,4.2 J5_1.S2@60.8,4.2 ; DD3_1.5@65.475,20.88 64.675,20.88 64.625,20.83 64.625,19.625 63.975,18.975 63.975,18.875 v1@66.825,18.875 ; R22_1.2@66.025,26.7 66.175,26.85 66.275,26.85 69.95,30.525 72.9,30.525
  Top Layer w1: D1_1.5 72.523,33.579 72.523,30.525 ; 72.563,30.525 75.578,27.51 75.619,27.51 76.149,26.98 C1_1.1@76.149,26.557
  Int1 (GND) w0.5: J5_1.3@51.145,13.6 51.35,13.395 51.35,12.068 51.643,11.775 57.7,11.775 64.925,19 65.796,19 65.808,18.988 66.862,18.988 v1(66.9,18.95) ; v1@66.9,19 72.19,24.29 D1_1.5@72.19,33.586
  Int2 (PWR) w0.5: v1(66.9,18.95) 66.9,12.193 67.193,11.9 70.757,11.9 71.05,12.193 71.05,13.38 J4_1.3
  Bottom Layer w0.5: J5_1.S1@45.3,4.2 J5_1.S2@60.8,4.2 ; D3_1.3@62.575,8.381 62.575,5.975 61.397,4.797 61.218,4.797 60.8,4.38 J5_1.S2@60.8,4.2 ; J4_1.S2 J4_1.S1 J5_1.S2@60.8,4.2
NetC1_1_2: C1_1.2 C5_1.2 C6_1.2 DD3_1.8 ISO1_1.10 ISO1_1.16 R23_1.1 XP1_1.2 | length 60.1
  Top Layer w0.5: ISO1_1.10 48.7,21.693 49.05,21.343 v1(49.05,21.3) ; C5_1.2 56.325,21.5 56.325,23.76 57.72,23.76 58.41,24.45 v1(58.45,24.45) 58.45,26 59.075,26.625 R23_1.1 60.05,26.625 60.05,27.582 60.343,27.875 62.75,27.875 63.075,27.55 63.075,25.175 63.56,24.69 DD3_1.8 66.275,24.69 67.61,26.025 71.575,26.025 73.65,23.95 73.65,23.9 73.925,23.625 77.507,23.625 ; v1(60.625,18.65) 60.679,18.65 60.904,18.875 61.9,18.875 61.925,18.85 C6_1.2 ; C6_1.2@61.987,18.875 C6_1.2@62.05,18.875 ; C1_1.2@78.95,26.725 78.95,25.068 77.507,23.625 ; XP1_1.2@80.85,22.6 78.532,22.6 77.507,23.625
  Int1 (GND) w0.5: v1(49.05,21.3) 55.3,21.3 v1(58.45,24.45) 58.45,20.825 v1(60.625,18.65)
NetC1_2_1: C1_2.1 C5_2.1 C6_2.1 D1_2.5 D3_2.3 DD3_2.5 ISO1_2.9 ISO1_2.15 J4_2.3 J4_2.S1 J4_2.S2 J5_2.3 J5_2.S1 J5_2.S2 R22_2.2 | length 167.1
  Top Layer w0.4: C5_2.1 13.25,21.425 13.5,21.675 ISO1_2.15 13.5,25.641 13.266,25.875 6.125,25.875 5.88,25.63 ISO1_2.9 5.88,20.395 8.6,17.675 23.725,17.675 v1@24.925,18.875
  Top Layer w0.5: J5_2.3 9.245,8.205 13.25,4.2 J5_2.S2 ; DD3_2.5 22.775,20.88 22.725,20.83 22.725,19.625 22.075,18.975 C6_2.1 v1@24.925,18.875 ; R22_2.2 24.125,26.7 24.275,26.85 24.375,26.85 27.614,30.089 30.29,30.089
  Top Layer w1: D1_2.5 30.29,30.089 33.309,27.07 C1_2.1
  Int1 (GND) w0.5: J5_2.3 9.45,13.395 9.45,12.068 9.743,11.775 15.8,11.775 23.025,19 23.896,19 23.908,18.988 24.962,18.988 v1(25,18.95) ; v1@25,19 25.05,19 30.29,24.24 D1_2.5
  Int2 (PWR) w0.5: v1(25,18.95) 25,12.193 25.293,11.9 28.857,11.9 29.15,12.193 29.15,13.38 J4_2.3
  Bottom Layer w0.5: J5_2.S1 J5_2.S2 ; D3_2.3 21.175,6.475 J5_2.S2 ; J4_2.S2 J4_2.S1 J5_2.S2
NetC1_2_2: C1_2.2 C5_2.2 C6_2.2 DD3_2.8 ISO1_2.10 ISO1_2.16 R23_2.1 XP1_2.2 | length 59.3
  Top Layer w0.5: v1(7.15,21.3) ISO1_2.10 ; C5_2.2 14.81,21.365 14.81,23.72 ISO1_2.16 15.82,23.76 16.51,24.45 v1(16.55,24.45) 16.55,26 17.175,26.625 R23_2.1 18.15,27.582 18.443,27.875 20.85,27.875 21.175,27.55 21.175,25.175 21.66,24.69 DD3_2.8 24.375,24.69 25.71,26.025 29.675,26.025 31.75,23.95 31.75,23.9 32.025,23.625 35.607,23.625 ; v1(18.725,18.65) 18.779,18.65 19.004,18.875 C6_2.2 ; C1_2.2 35.9,26.384 35.9,23.918 35.607,23.625 ; XP1_2.2 36.632,22.6 35.607,23.625
  Int1 (GND) w0.5: v1(7.15,21.3) 13.4,21.3 v1(16.55,24.45) 16.55,20.825 v1(18.725,18.65)
NetC9_1: C9.1 U8.73 | length 3.1
  Top Layer w0.254: U8.73 49.35,53.4 C9.1
NetC10_2: C10.2 Q1.2 U8.12 | length 12.8
  Top Layer w0.254: C10.2 20.125,49.781 20.274,49.93 23.63,49.93 Q1.2 23.65,49.323 24.073,48.9 U8.12
NetC14_2: C14.2 Q1.1 U8.13 | length 16.2
  Top Layer w0.254: C14.2 20.323,40.152 23.452,40.152 24.073,40.773 24.073,43.173 29.3,48.4 U8.13
NetC22_2: C22.2 U8.49 | length 3.5
  Top Layer w0.254: C22.2 44.45,37.675 U8.49
NetC28_1: C28.1 C29.1 IC2.6 | length 4.1
  Top Layer w0.254: C28.1 C29.1 16.1,59.95 16.995,60.845 IC2.6
NetC31_2: C31.2 IC2.4 Q2.1 | length 15.6
  Top Layer w0.254: C31.2 10.475,63.625 10.575,63.525 10.575,59.908 10.724,59.759 10.934,59.759 13.02,61.845 IC2.4
NetC32_2: C32.2 IC2.5 Q2.2 | length 16.6
  Top Layer w0.254: C32.2 10.525,54.225 Q2.2 10.575,58.625 13.295,61.345 IC2.5
NetD1_1_7: D1_1.7 XP1_1.3 | length 9.9
  Top Layer w0.5: D1_1.7@77.27,33.586 80.85,30.007 XP1_1.3@80.85,25.14
NetD1_2_7: D1_2.7 XP1_2.3 | length 9.9
  Top Layer w0.5: D1_2.7 38.95,30.007 XP1_2.3
NetD2_C: D2.C DD1.2 L1.P$1 | length 21.8
  Top Layer w1: DD1.2 58.949,67.15 60.492,65.606 D2.C 64.581,65.606 68.575,69.6 68.575,72 70.075,73.5 L1.P$1
NetD11_2: D11.2 R49.2 | length 2.7
  Top Layer w0.254: D11.2 60.575,47.4 R49.2
NetD11_3: D11.3 R47.2 | length 3.5
  Top Layer w0.254: R47.2 58.75,44.925 59.125,44.55 D11.3
NetD11_4: D11.4 R48.2 | length 2.5
  Top Layer w0.254: D11.4 60.65,44.125 R48.2
NetD15_A: D15.A J2.2 | length 9.6
  Top Layer w1: J2.2 41.909,87.984 51.241,87.984 D15.A
NetDD1_4: DD1.4 R1.1 R5.1 | length 19.7
  Top Layer w0.5: DD1.4 55.05,70.525 57.725,70.525 v1(57.75,70.5) ; v1(62.075,61.25) 62.1,61.225 62.1,60.15 64.1,58.15 R1.1 64.213,58.138 64.213,56.337 R5.1
  Int1 (GND) w0.5: v1(57.75,70.5) 62.075,66.175 v1(62.075,61.25)
NetDD3_1_1: DD3_1.1 ISO1_1.11 R23_1.2 | length 25.7
  Top Layer w0.254: ISO1_1.11@49.975,23.795 49.975,20.1 51.825,18.25 58.975,18.25 60.9,20.175 62.176,20.175 63.202,21.201 63.202,23.923 63,24.125 62.435,24.69 61.475,24.69 61.65,24.865 R23_1.2@61.65,26.625
NetDD3_1_2: DD3_1.2 DD3_1.3 ISO1_1.13 R22_1.1 | length 25.9
  Top Layer w0.254: ISO1_1.13@52.55,23.827 52.55,19.924 52.699,19.775 57.525,19.775 58.375,20.625 58.375,22.075 ; DD3_1.3@60.675,22.15 58.45,22.15 58.375,22.075 ; v1(62.525,23.4) 62.515,23.41 60.685,23.41 60.675,23.42 58.845,23.42 58.375,22.95 58.375,22.075 ; v1(64.4,28) 64.4,26.625 R22_1.1@64.425,26.6
  Int1 (GND) w0.254: v1(62.525,23.4) 62.525,26.125 v1(64.4,28)
NetDD3_1_4: DD3_1.4 ISO1_1.12 | length 14.7
  Top Layer w0.254: ISO1_1.12@51.275,24.01 51.275,20.075 52.57,18.78 57.775,18.78 59.875,20.88 DD3_1.4@60.675,20.88
NetDD3_1_6: DD3_1.6 R11_1.2 | length 3.5
  Top Layer w0.5: DD3_1.6@65.475,22.15 67.15,22.15 67.8,21.5 68.625,21.5 R11_1.2@68.675,21.55
NetDD3_1_7: DD3_1.7 R10_1.2 | length 3.2
  Top Layer w0.5: DD3_1.7@65.475,23.42 65.49,23.435 68.66,23.435 R10_1.2@68.675,23.45
NetDD3_2_1: DD3_2.1 ISO1_2.11 R23_2.2 | length 25.5
  Top Layer w0.254: ISO1_2.11 8.42,19.755 9.925,18.25 17.075,18.25 19,20.175 20.276,20.175 21.302,21.201 21.302,23.923 21.1,24.125 20.535,24.69 19.575,24.69 19.75,24.865 R23_2.2
NetDD3_2_2: DD3_2.2 DD3_2.3 ISO1_2.13 R22_2.1 | length 25.6
  Top Layer w0.254: ISO1_2.13 10.96,19.924 11.109,19.775 15.625,19.775 16.475,20.625 16.475,22.075 ; DD3_2.3 16.55,22.15 16.475,22.075 ; v1(20.625,23.4) 20.615,23.41 18.785,23.41 DD3_2.2 16.945,23.42 16.475,22.95 16.475,22.075 ; v1(22.5,28) 22.5,26.625 R22_2.1
  Int1 (GND) w0.254: v1(20.625,23.4) 20.625,26.125 v1(22.5,28)
NetDD3_2_4: DD3_2.4 ISO1_2.12 | length 14.4
  Top Layer w0.254: ISO1_2.12 9.69,19.76 10.67,18.78 15.875,18.78 17.975,20.88 DD3_2.4
NetDD3_2_6: DD3_2.6 R11_2.2 | length 3.5
  Top Layer w0.5: DD3_2.6 25.25,22.15 25.9,21.5 26.725,21.5 R11_2.2
NetDD3_2_7: DD3_2.7 R10_2.2 | length 3.2
  Top Layer w0.5: DD3_2.7 23.59,23.435 26.76,23.435 R10_2.2
NetIC1_1: IC1.1 U8.77 | length 13.9
  Top Layer w0.254: U8.77 44.45,57.2 44.8,57.55 45.15,57.55 v1(46.275,56.425) ; v1(53.075,54.975) 53.196,54.975 53.298,54.873 54.972,54.873 55.145,54.7 IC1.1
  Int1 (GND) w0.254: v1(46.275,56.425) 47.725,54.975 v1(53.075,54.975)
NetIC1_2: IC1.2 U8.79 | length 22.8
  Top Layer w0.254: U8.79 43.45,58.075 v1(44.85,59.475) ; IC1.2 56.432,53.883 56.432,51.892 v1(56.45,51.875)
  Int1 (GND) w0.254: v1(44.85,59.475) 47.327,56.998 53.08,56.998 53.084,57.002 54.873,57.002 56.45,55.425 v1(56.45,51.875)
NetIC1_3: IC1.3 U8.81 | length 25.5
  Top Layer w0.254: U8.81 42.45,59.15 v1(43.275,59.975) ; IC1.3 57.692,53.893 57.692,51.858 v1(57.7,51.85)
  Int1 (GND) w0.254: v1(43.275,59.975) 43.275,58.468 50.114,51.629 53.305,51.629 53.736,51.198 57.048,51.198 v1(57.7,51.85)
NetIC1_5: IC1.5 U8.80 | length 21.9
  Top Layer w0.254: U8.80 42.95,58.532 43.846,59.429 44.743,60.325 v1(49.2,60.325) ; v1(58.95,61.075) 58.952,61.073 58.952,58.703 IC1.5
  Int1 (GND) w0.254: v1(49.2,60.325) 58.2,60.325 v1(58.95,61.075)
NetIC1_6: IC1.6 U8.78 | length 18.6
  Top Layer w0.254: U8.78 43.95,57.525 v1(44.8,58.375) ; v1(53.153,56.325) 53.178,56.35 57.525,56.35 57.685,56.51 IC1.6
  Int1 (GND) w0.254: v1(44.8,58.375) 44.809,58.366 45.317,58.366 47.333,56.35 53.128,56.35 v1(53.153,56.325)
NetIC1_7: IC1.7 U8.82 | length 20.4
  Top Layer w0.254: U8.82 41.95,59.607 43.345,61.002 55.594,61.002 56.415,60.181 IC1.7
NetIC2_2: IC2.2 R21.1 R24.2 | length 26.9
  Top Layer w0.254: R21.1 11.5,83.202 11.723,83.425 v1(12.6,83.425) 12.6,82.707 11.825,81.932 11.725,81.932 11.502,81.709 R24.2 ; v1(16.025,63.625) 16.805,62.845 IC2.2
  Int1 (GND) w0.254: v1(12.6,83.425) 12.6,67.05 v1(16.025,63.625)
NetIC2_3: IC2.3 R19.1 R25.2 | length 31.3
  Top Layer w0.254: R25.2 11.789,88.096 11.789,86.539 R19.1 12.506,86.525 13.19,85.841 13.19,85.285 v1(13.275,85.2) ; v1(14.475,63.025) 15,63.025 15.68,62.345 IC2.3
  Int1 (GND) w0.254: v1(13.275,85.2) 11.923,83.848 11.923,66.102 14.475,63.55 v1(14.475,63.025)
NetIC2_7: IC2.7 R8.1 R15.2 | length 4.3
  Top Layer w0.254: R15.2 18.05,57.65 17.725,57.975 v1(17.725,58.75) 17.725,58.774 18.425,59.474 IC2.7
  Bottom Layer w0.254: v1(17.725,58.75) 17.725,57.925 R8.1
NetIC2_8: IC2.8 R7.1 R14.2 | length 4.6
  Top Layer w0.254: IC2.8 18.925,58.875 v1(18.825,58.775) 18.825,58.75 19.235,58.34 19.235,57.848 19.458,57.625 R14.2
  Bottom Layer w0.254: v1(18.825,58.775) 18.91,58.69 19.285,58.69 19.55,58.425 R7.1
NetIC2_10: IC2.10 R16.2 | length 5.4
  Top Layer w0.254: IC2.10 19.938,60.187 19.938,59.639 21.052,58.525 23.075,58.525 23.427,58.173 23.427,57.823 23.65,57.6 R16.2
NetIC2_11: IC2.11 R9.1 R17.2 | length 39.5
  Top Layer w0.254: IC2.11 20.438,60.187 20.438,59.781 20.844,59.375 v1(22.675,59.375) ; R17.2 35.462,37.237 36.812,37.237 v1(36.825,37.25)
  Int1 (GND) w0.254: v1(22.675,59.375) 23.687,59.375 24.114,59.802 25.005,59.802 25.625,59.182 25.625,57.95 34.375,49.2 34.375,45.4 35.64,44.135 38.19,44.135 38.625,43.7 38.625,42.05 36.825,40.25 v1(36.825,37.25)
  Bottom Layer w0.254: v1(22.675,59.375) 22.675,59.075 24.075,57.675 R9.1
NetIC2_14: IC2.14 R12.1 R20.2 | length 8
  Top Layer w0.254: IC2.14 23.723,61.345 24.945,60.123 25.505,60.123 25.932,60.55 R12.1 28.775,60.55 R20.2
NetIC2_24: IC2.24 R18.1 | length 3.8
  Top Layer w0.254: R18.1 16.95,65.67 18.425,64.195 IC2.24
NetISO1_1_4: ISO1_1.4 U8.70 | length 24.3
  Top Layer w0.254: U8.70 51.75,51.9 52.51,51.14 ISO1_1.4
NetISO1_1_5: ISO1_1.5 U8.68 | length 22.1
  Top Layer w0.254: U8.68 48.575,50.9 v1(49.275,50.2) ; ISO1_1.5 51.245,33.045 51.245,50.22 v1(51.25,50.225)
  Int1 (GND) w0.254: v1(49.275,50.2) 49.287,50.213 51.237,50.213 v1(51.25,50.225)
NetISO1_1_6: ISO1_1.6 U8.69 | length 21.5
  Top Layer w0.254: U8.69 49.575,51.4 49.97,51.005 ISO1_1.6
NetISO1_2_4: ISO1_2.4 U8.88 | length 41
  Top Layer w0.254: ISO1_2.4 10.993,33.072 10.993,35.318 v1(11.025,35.35) ; v1(38.275,57.875) 38.95,57.2 U8.88
  Int2 (PWR) w0.254: v1(11.025,35.35) 15.75,35.35 v1(38.275,57.875)
NetISO1_2_5: ISO1_2.5 U8.86 | length 47.6
  Top Layer w0.254: v1(9.65,37.725) 9.67,37.705 9.67,33.06 ISO1_2.5 ; v1(39.6,59.75) 39.6,59.629 39.95,59.279 U8.86
  Int2 (PWR) w0.254: v1(9.65,37.725) 15.75,37.725 37.775,59.75 v1(39.6,59.75)
NetISO1_2_6: ISO1_2.6 U8.87 | length 46.1
  Top Layer w0.254: ISO1_2.6 8.435,33.055 8.435,36.585 v1(8.45,36.6) ; v1(38.925,58.775) 39.45,58.25 U8.87
  Int2 (PWR) w0.254: v1(8.45,36.6) 15.5,36.6 37.675,58.775 v1(38.925,58.775)
NetJ4_1_4: J4_1.4 J5_1.4 XP1_1.1 | length 32.4
  Top Layer w0.45: J5_1.4 51.951,16.14 53.226,14.865 54.708,14.865 54.718,14.875 55.978,14.875 55.988,14.865 58.265,14.865 71.265,14.865 J4_1.4 76.46,20.06 XP1_1.1
NetJ4_1_5: J4_1.5 J5_1.5 | length 24.7
  Top Layer w0.5: J5_1.5@53.685,13.6 53.685,10.683 54.168,10.2 70.41,10.2 J4_1.5
NetJ4_1_6: J4_1.6 J5_1.6 | length 25
  Int2 (PWR) w0.5: J5_1.6 54.491,16.14 55.766,14.865 60.94,14.865 65.85,19.775 67.875,19.775 69.8,17.85 73.37,17.85 J4_1.6
NetJ4_1_7: J4_1.7 J5_1.7 | length 23.4
  Int2 (PWR) w0.5: J5_1.7@56.225,13.6 63.925,13.6 66.575,10.95 75.5,10.95 76.35,11.8 J4_1.7
NetJ4_1_8: J4_1.8 J5_1.8 | length 23.9
  Int2 (PWR) w0.5: J5_1.8@57.295,16.14 60.925,16.14 65.26,20.475 69.555,20.475 71.48,18.55 75.21,18.55 J4_1.8
NetJ4_2_4: J4_2.4 J5_2.4 XP1_2.1 | length 32.7
  Top Layer w0.5: J5_2.4 10.826,16.14 12.101,14.865 13.583,14.865 13.593,14.875 15.057,14.875 15.067,14.865 16.123,14.865 16.133,14.875 27.841,14.875 27.851,14.865 29.054,14.865 30.329,16.14 J4_2.4 30.64,18.84 31.86,20.06 XP1_2.1
NetJ4_2_5: J4_2.5 J5_2.5 | length 24.7
  Top Layer w0.5: J5_2.5 11.785,10.683 12.268,10.2 28.51,10.2 J4_2.5
NetJ4_2_6: J4_2.6 J5_2.6 | length 24.2
  Int2 (PWR) w0.5: J5_2.6 13.366,16.14 14.641,14.865 18.74,14.865 23.625,19.75 25.55,19.75 27.525,17.775 31.545,17.775 J4_2.6
NetJ4_2_7: J4_2.7 J5_2.7 | length 23.4
  Int2 (PWR) w0.5: J5_2.7 22.025,13.6 24.675,10.95 33.6,10.95 34.45,11.8 J4_2.7
NetJ4_2_8: J4_2.8 J5_2.8 | length 23.7
  Int2 (PWR) w0.5: J5_2.8 19.025,16.14 23.335,20.45 27.68,20.45 29.58,18.55 33.31,18.55 J4_2.8
NetJ_10: J.10 R19.2 | length 20.9
  Top Layer w0.254: v1(8.975,84.725) 9.06,84.81 9.06,85.31 10.175,86.425 R19.2
  Bottom Layer w0.254: v1(8.975,84.725) 9.2,84.725 10.55,86.075 20.85,86.075 23,88.225 J.10
NetJ_11: J.11 R21.2 | length 10.5
  Top Layer w0.254: R21.2 9.9,83.85 10.573,84.523 14.228,84.523 J.11
NetR43_1: R43.1 U8.94 | length 3.4
  Top Layer w0.254: U8.94 35.95,59.35 R43.1
NetR47_1: R47.1 U8.7 | length 29.3
  Top Layer w0.254: U8.7 32.55,51.4 34.804,53.654 44.171,53.654 v1(44.175,53.65) ; v1(56,48.4) 56,47 R47.1
  Int1 (GND) w0.254: v1(44.175,53.65) 49.425,48.4 v1(56,48.4)
NetR48_1: R48.1 U8.8 | length 33.2
  Top Layer w0.254: U8.8 32.775,50.9 35.027,53.152 42.598,53.152 v1(43.4,52.35) ; v1(57.05,41.65) 58.45,41.65 R48.1
  Int1 (GND) w0.254: v1(43.4,52.35) 54.1,41.65 v1(57.05,41.65)
NetR49_1: R49.1 U8.9 | length 30.8
  Top Layer w0.254: U8.9 33.15,50.4 35.225,52.475 v1(41.925,52.475) ; v1(57.1,49.975) 58.5,49.975 R49.1
  Int1 (GND) w0.254: v1(41.925,52.475) 43.8,54.35 45.2,54.35 48.375,51.175 52.45,51.175 53.65,49.975 v1(57.1,49.975)
NetU8_72: U8.72 X2.2 | length 52.5
  Top Layer w0.254: v1(32.923,48.975) 32.95,48.975 35.648,51.673 43.68,51.673 44.907,52.9 U8.72
  Int1 (GND) w0.254: X2.2 11.094,53.329 20.209,53.329 27.938,45.6 31.1,45.6 31.8,46.3 31.8,47.825 32.148,48.173 32.148,48.18 32.545,48.577 32.551,48.577 32.923,48.949 v1(32.923,48.975)
NetU8_76: U8.76 X2.4 | length 46.6
  Top Layer w0.254: v1(41.975,54.475) 44.7,54.475 44.95,54.725 U8.76
  Bottom Layer w0.254: X2.4 15.485,51.44 19.075,47.85 30.175,47.85 36.9,54.575 37,54.475 v1(41.975,54.475)
P1_RX_N: IC2.22 J.6 R2.1 | length 13
  Top Layer w0.254: IC2.22 19.425,65.828 v1(19.412,65.841) 19.429,65.858 19.429,66.804 19.775,67.15 R2.1
  Int1 (GND) w0.254: v1(19.412,65.841) 19.412,65.909 19.109,66.212 19.109,74.124 19.258,74.273 19.953,74.273 J.6
P1_RX_P: IC2.23 J.3 R3.1 | length 18.9
  Top Layer w0.254: R3.1 18.525,67.1 18.525,65.292 18.917,64.9 18.917,63.998 IC2.23
  Int1 (GND) w0.254: v1@18.601,65.185 18.601,70.244 18.601,74.372 19.69,75.461 22.411,75.461 J.3
  other v1: 18.525,65.3
P1_TX_N: IC2.20 J.2 R4.1 | length 15.8
  Top Layer w0.254: IC2.20 20.425,64.902 20.837,65.315 21.115,65.315 21.285,65.485 21.285,65.763 21.382,65.859 21.926,65.859 22.352,66.285 22.352,66.778 22.501,66.927 22.602,66.927 R4.1
  Int1 (GND) w0.254: v1(21.2,65.4) 21.285,65.485 21.285,65.783 24.189,68.686 24.189,74.124 24.338,74.273 25.033,74.273 J.2
P1_TX_P: IC2.21 J.1 R6.1 | length 18.4
  Top Layer w0.254: IC2.21 19.917,63.998 19.917,65.388 20.523,65.994 v1(20.523,66.036) ; v1@20.564,66.036 20.649,66.122 20.926,66.122 21.118,66.313 21.738,66.313 21.898,66.473 21.898,66.778 21.749,66.927 21.648,66.927 R6.1
  Int1 (GND) w0.254: v1(20.523,66.036) 20.608,66.122 20.906,66.122 23.681,68.897 23.681,74.372 24.77,75.461 24.951,75.461 J.1
RESET: U8.14 X2.1 | length 39.5
  Top Layer w0.254: U8.14 v1(32.825,47.9)
  Int1 (GND) w0.254: X2.1 13.18,52.875 20.021,52.875 27.825,45.071 31.871,45.071 32.825,46.025 v1(32.825,47.9)
RMII_CRS_DV: R17.1 U8.32 | length 2.2
  Top Layer w0.254: R17.1 35.55,38.825 35.95,39.225 U8.32
RMII_MDC: IC2.13 U8.16 | length 20
  Top Layer w0.254: IC2.13 23.005,60.845 v1(24.725,59.125) ; v1(29.15,46.925) 29.162,46.912 31.258,46.912 U8.16
  Int1 (GND) w0.254: v1(24.725,59.125) 24.725,51.35 v1(29.15,46.925)
RMII_MDIO: IC2.12 R13.1 U8.25 | length 31.4
  Top Layer w0.254: IC2.12 22.807,60.2 23.352,59.655 23.352,59.355 24.919,57.788 25.637,57.788 R13.1 27.1,57.675 v1(28.35,56.425) ; U8.25 33.675,42.4 36.175,44.9 v1(36.875,44.9)
  Int1 (GND) w0.254: v1(28.35,56.425) 35,49.775 35,45.8 35.9,44.9 v1(36.875,44.9)
RMII_REF_CLK: R20.1 U8.24 | length 23.1
  Top Layer w0.254: R20.1 30.425,57.4 v1(31.35,56.475) ; U8.24 32.825,42.9 v1(36.275,46.35)
  Int1 (GND) w0.254: v1(31.35,56.475) 36.402,51.423 36.402,46.598 36.275,46.471 v1(36.275,46.35)
RMII_RXD0: R14.1 U8.33 | length 29.1
  Top Layer w0.254: v1(19.448,52.198) 19.5,52.25 19.5,55.975 R14.1 ; U8.33 36.45,42.332 37.407,43.29 37.615,43.29 v1(37.7,43.375)
  Int1 (GND) w0.254: v1(19.448,52.198) 19.552,52.198 28.375,43.375 v1(37.7,43.375)
RMII_RXD1: R15.1 U8.34 | length 29.4
  Top Layer w0.254: v1(18,52.05) 18,56 R15.1 ; U8.34 36.963,40.733 36.963,41.878 37.475,42.39 v1(37.475,42.4)
  Int1 (GND) w0.254: v1(18,52.05) 27.65,42.4 v1(37.475,42.4)
RMII_TX_EN: IC2.16 U8.48 | length 34.3
  Top Layer w0.254: IC2.16 25.105,62.345 v1(25.775,61.675) ; v1(42.925,45.225) 42.925,42.925 43.938,41.912 43.938,40.733 U8.48
  Int1 (GND) w0.254: v1(25.775,61.675) 28.025,61.675 42.925,46.775 v1(42.925,45.225)
RMII_TXD0: IC2.17 U8.51 | length 34.9
  Top Layer w0.254: IC2.17 26.059,62.845 26.304,62.6 v1(26.425,62.6) ; v1(43.925,45.25) 43.925,44.026 45.551,42.4 U8.51
  Int1 (GND) w0.254: v1(26.425,62.6) 27.742,62.6 43.925,46.417 v1(43.925,45.25)
RMII_TXD1: IC2.18 U8.52 | length 35
  Top Layer w0.254: IC2.18 21.58,63.335 27.115,63.335 v1(27.125,63.325) ; v1(44.875,45.3) 44.875,43.793 45.755,42.913 46.617,42.913 U8.52
  Int1 (GND) w0.254: v1(27.125,63.325) 27.8,63.325 44.875,46.25 v1(44.875,45.3)
V_24pwr: C2.1 C26.2 D15.C DD1.1 | length 61.1
  Top Layer w1: D15.C 51.519,81.125 C26.2 59.7,81.125 C2.1 65.125,86.55 67.675,86.55 70.75,83.475 70.75,79.975 67.95,77.175 52.5,77.175 51.55,76.225 51.55,66.15 52.225,65.475 55,65.475 DD1.1
pads on no net: D1_1.4 D1_1.6 D1_2.4 D1_2.6 ISO1_1.3 ISO1_1.14 ISO1_2.3 ISO1_2.14 J4_1. J4_2. J5_1. J5_2. J. J.7 J.8 U8.1 U8.2 U8.3 U8.4 U8.5 U8.10 U8.11 U8.15 U8.17 U8.18 U8.19 U8.26 U8.29 U8.30 U8.31 U8.35 U8.36 U8.37 U8.38 U8.39 U8.40 U8.41 U8.42 U8.43 U8.44 U8.45 U8.46 U8.47 U8.53 U8.54 U8.55 U8.56 U8.57 U8.58 U8.59 U8.60 U8.61 U8.62 U8.63 U8.64 U8.65 U8.66 U8.67 U8.71 U8.83 U8.84 U8.85 U8.89 U8.90 U8.91 U8.92 U8.93 U8.95 U8.96 U8.97 U8.98

## Polygon pours and split planes (outlines as drawn)
GND on Bottom Layer "GND" (solid, remove dead copper, pour order 1): 0,0 0,90.8 83.9,90.8 83.9,0
GND on Int2 (PWR) "GND" (solid, remove dead copper, pour order 3): 0,0 0,90.8 83.9,90.8 83.9,0
GND on Int1 (GND) "GND" (solid, remove dead copper, pour order 2): 0,0 0,90.8 83.9,90.8 83.9,0
GND on Top Layer "GND" (solid, remove dead copper, pour order 0): 0,0 0,90.8 83.9,90.8 83.9,0

## Keep-outs
Keep-Out Layer:
  the board outline again, w0.3

## Other copper
Top Layer:
  pour cut-out: 41.95,0.75 41.975,15.575 43.85,17.45 45.15,17.45 46.575,18.875 46.575,28.575 47.325,29.325 57.025,29.325 58.775,31.075 65.375,31.075 66.761,32.461 66.761,34.836 82.336,34.836 82.35,34.85 83.2,34 83.2,0.75
  pour cut-out: 0.725,28.7 15.075,28.7 17.6,31.225 24.125,31.225 25.425,32.525 25.425,34.836 25.589,35 38.75,35 40.25,33.5 40.25,17.3 41.975,15.575 41.95,15.55 41.95,0.75 0.725,0.75
Int1 (GND):
  pour cut-out: 41.95,0.75 41.975,15.575 43.85,17.45 45.15,17.45 46.575,18.875 46.575,28.575 47.325,29.325 57.025,29.325 58.775,31.075 65.375,31.075 66.761,32.461 66.761,34.836 82.336,34.836 82.35,34.85 83.2,34 83.2,0.75
  pour cut-out: 0.725,28.7 15.075,28.7 17.6,31.225 24.125,31.225 25.425,32.525 25.425,34.836 25.589,35 38.75,35 40.25,33.5 40.25,17.3 41.975,15.575 41.95,15.55 41.95,0.75 0.725,0.75
Int2 (PWR):
  pour cut-out: 41.95,0.75 41.975,15.575 43.85,17.45 45.15,17.45 46.575,18.875 46.575,28.575 47.325,29.325 57.025,29.325 58.775,31.075 65.375,31.075 66.761,32.461 66.761,34.836 82.336,34.836 82.35,34.85 83.2,34 83.2,0.75
  pour cut-out: 0.725,28.7 15.075,28.7 17.6,31.225 24.125,31.225 25.425,32.525 25.425,34.836 25.589,35 38.75,35 40.25,33.5 40.25,17.3 41.975,15.575 41.95,15.55 41.95,0.75 0.725,0.75
Bottom Layer:
  pour cut-out: 41.95,0.75 41.975,15.575 43.85,17.45 45.15,17.45 46.575,18.875 46.575,28.575 47.325,29.325 57.025,29.325 58.775,31.075 65.375,31.075 66.761,32.461 66.761,34.836 82.336,34.836 82.35,34.85 83.2,34 83.2,0.75
  pour cut-out: 0.725,28.7 15.075,28.7 17.6,31.225 24.125,31.225 25.425,32.525 25.425,34.836 25.589,35 38.75,35 40.25,33.5 40.25,17.3 41.975,15.575 41.95,15.55 41.95,0.75 0.725,0.75

## Silkscreen, mask and mechanical layers (free items; w line width, h text height)
Top Overlay:
  lines w0.3: 0.725,0.75 0.725,0.8 0.725,28.7 15.075,28.7 17.6,31.225 24.125,31.225 25.175,32.275 25.425,32.525 25.425,34.9 25.525,35 38.75,35 40.25,33.5 40.25,30.275 40.25,17.5 41.95,15.8 41.95,0.75 0.725,0.75 ; 41.975,0.75 41.975,15.575 43.85,17.45 45.15,17.45 46.575,18.875 46.575,28.575 47.325,29.325 57.025,29.325 58.775,31.075 65.375,31.075 66.425,32.125 66.675,32.375 66.675,34.75 66.775,34.85 82.35,34.85 83.2,34 83.2,0.75 41.975,0.75
  text "Ethernet" at 32.071,82.379 h1 r90
  text "24V" at 38.054,81.954 h1
  text "+3.3" at 4.521,55.954 h1 r90
  text "R" at 4.471,41.229 h1 r90
  text "RS485" at 2.496,7.004 h1 r90
  text "RS485" at 22.471,7.004 h1 r90
  text "RS485" at 43.696,7.004 h1 r90
  text "RS485" at 64.371,7.004 h1 r90